# Altium PCB Master-Slave.PcbDoc (part 1 of 2)
Units mil, origin at the board's own origin, x right, y up, seen from the top; angles counter-clockwise.
Board outline 5500 x 5500 mil, 4 copper layers (Top Layer, Ground, Power, Bottom Layer); 228 components, 118 nets, 798 pads, 388 vias.
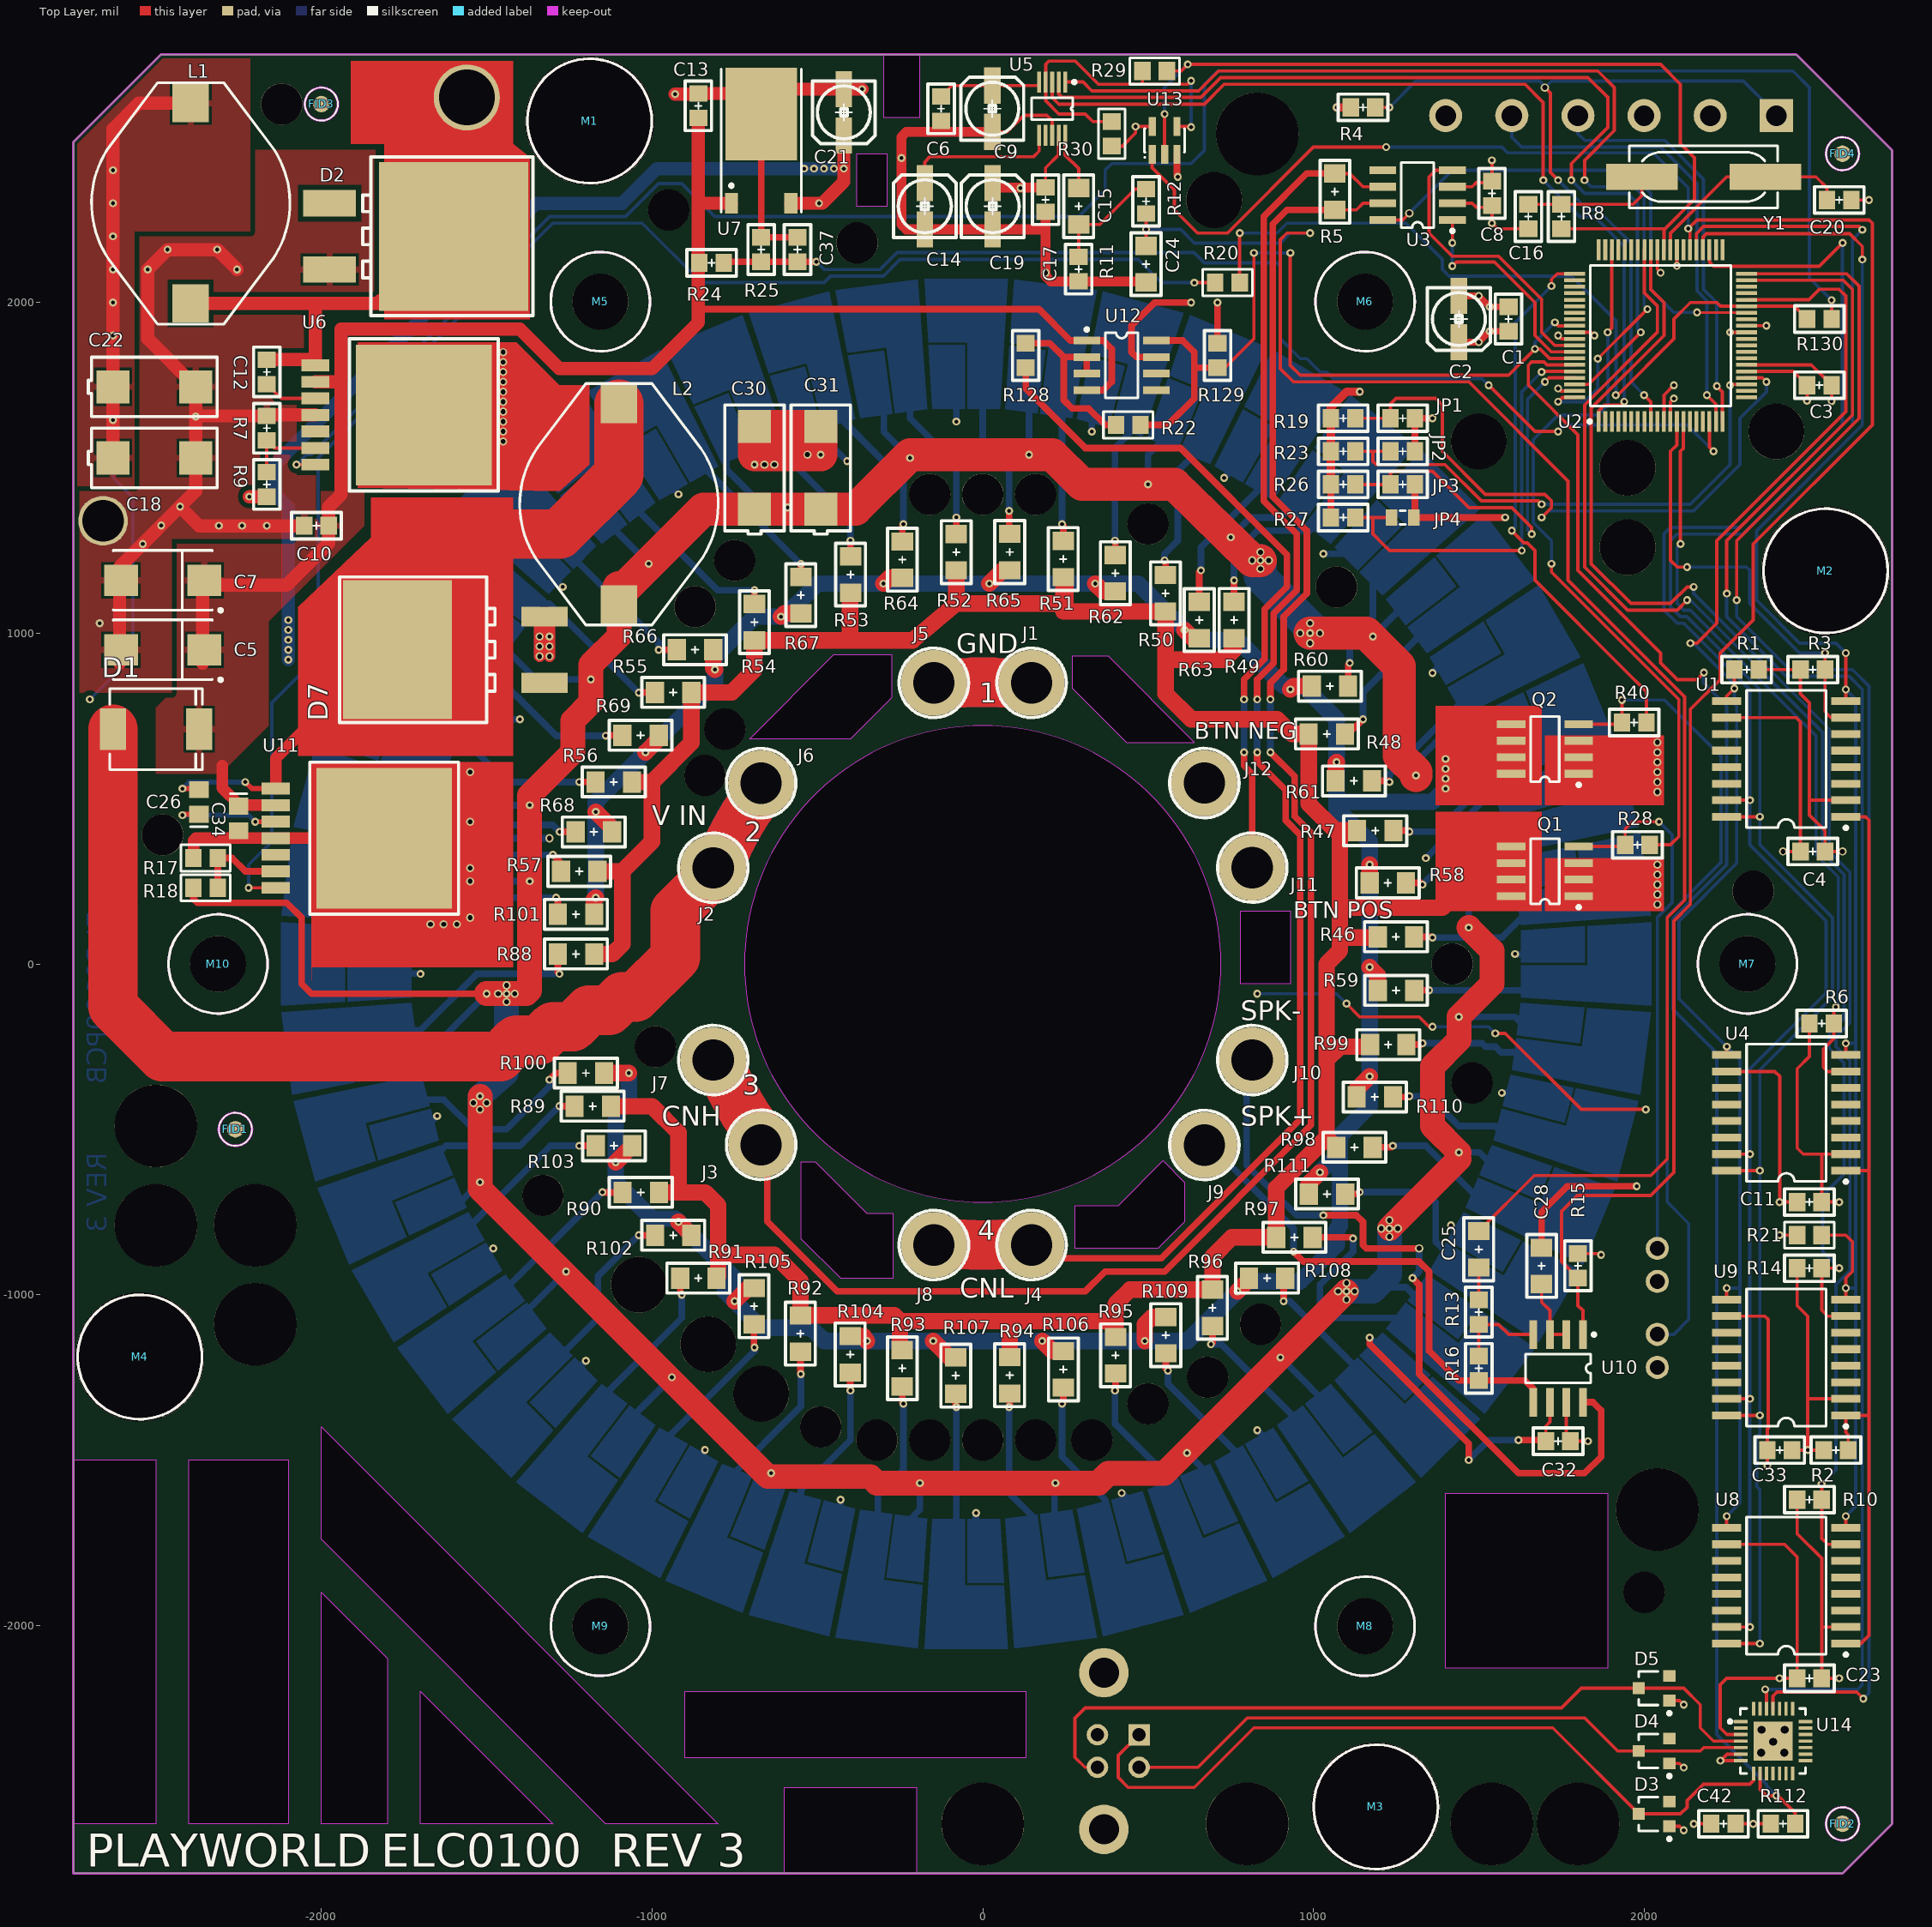
[diagram p0: Top Layer view]
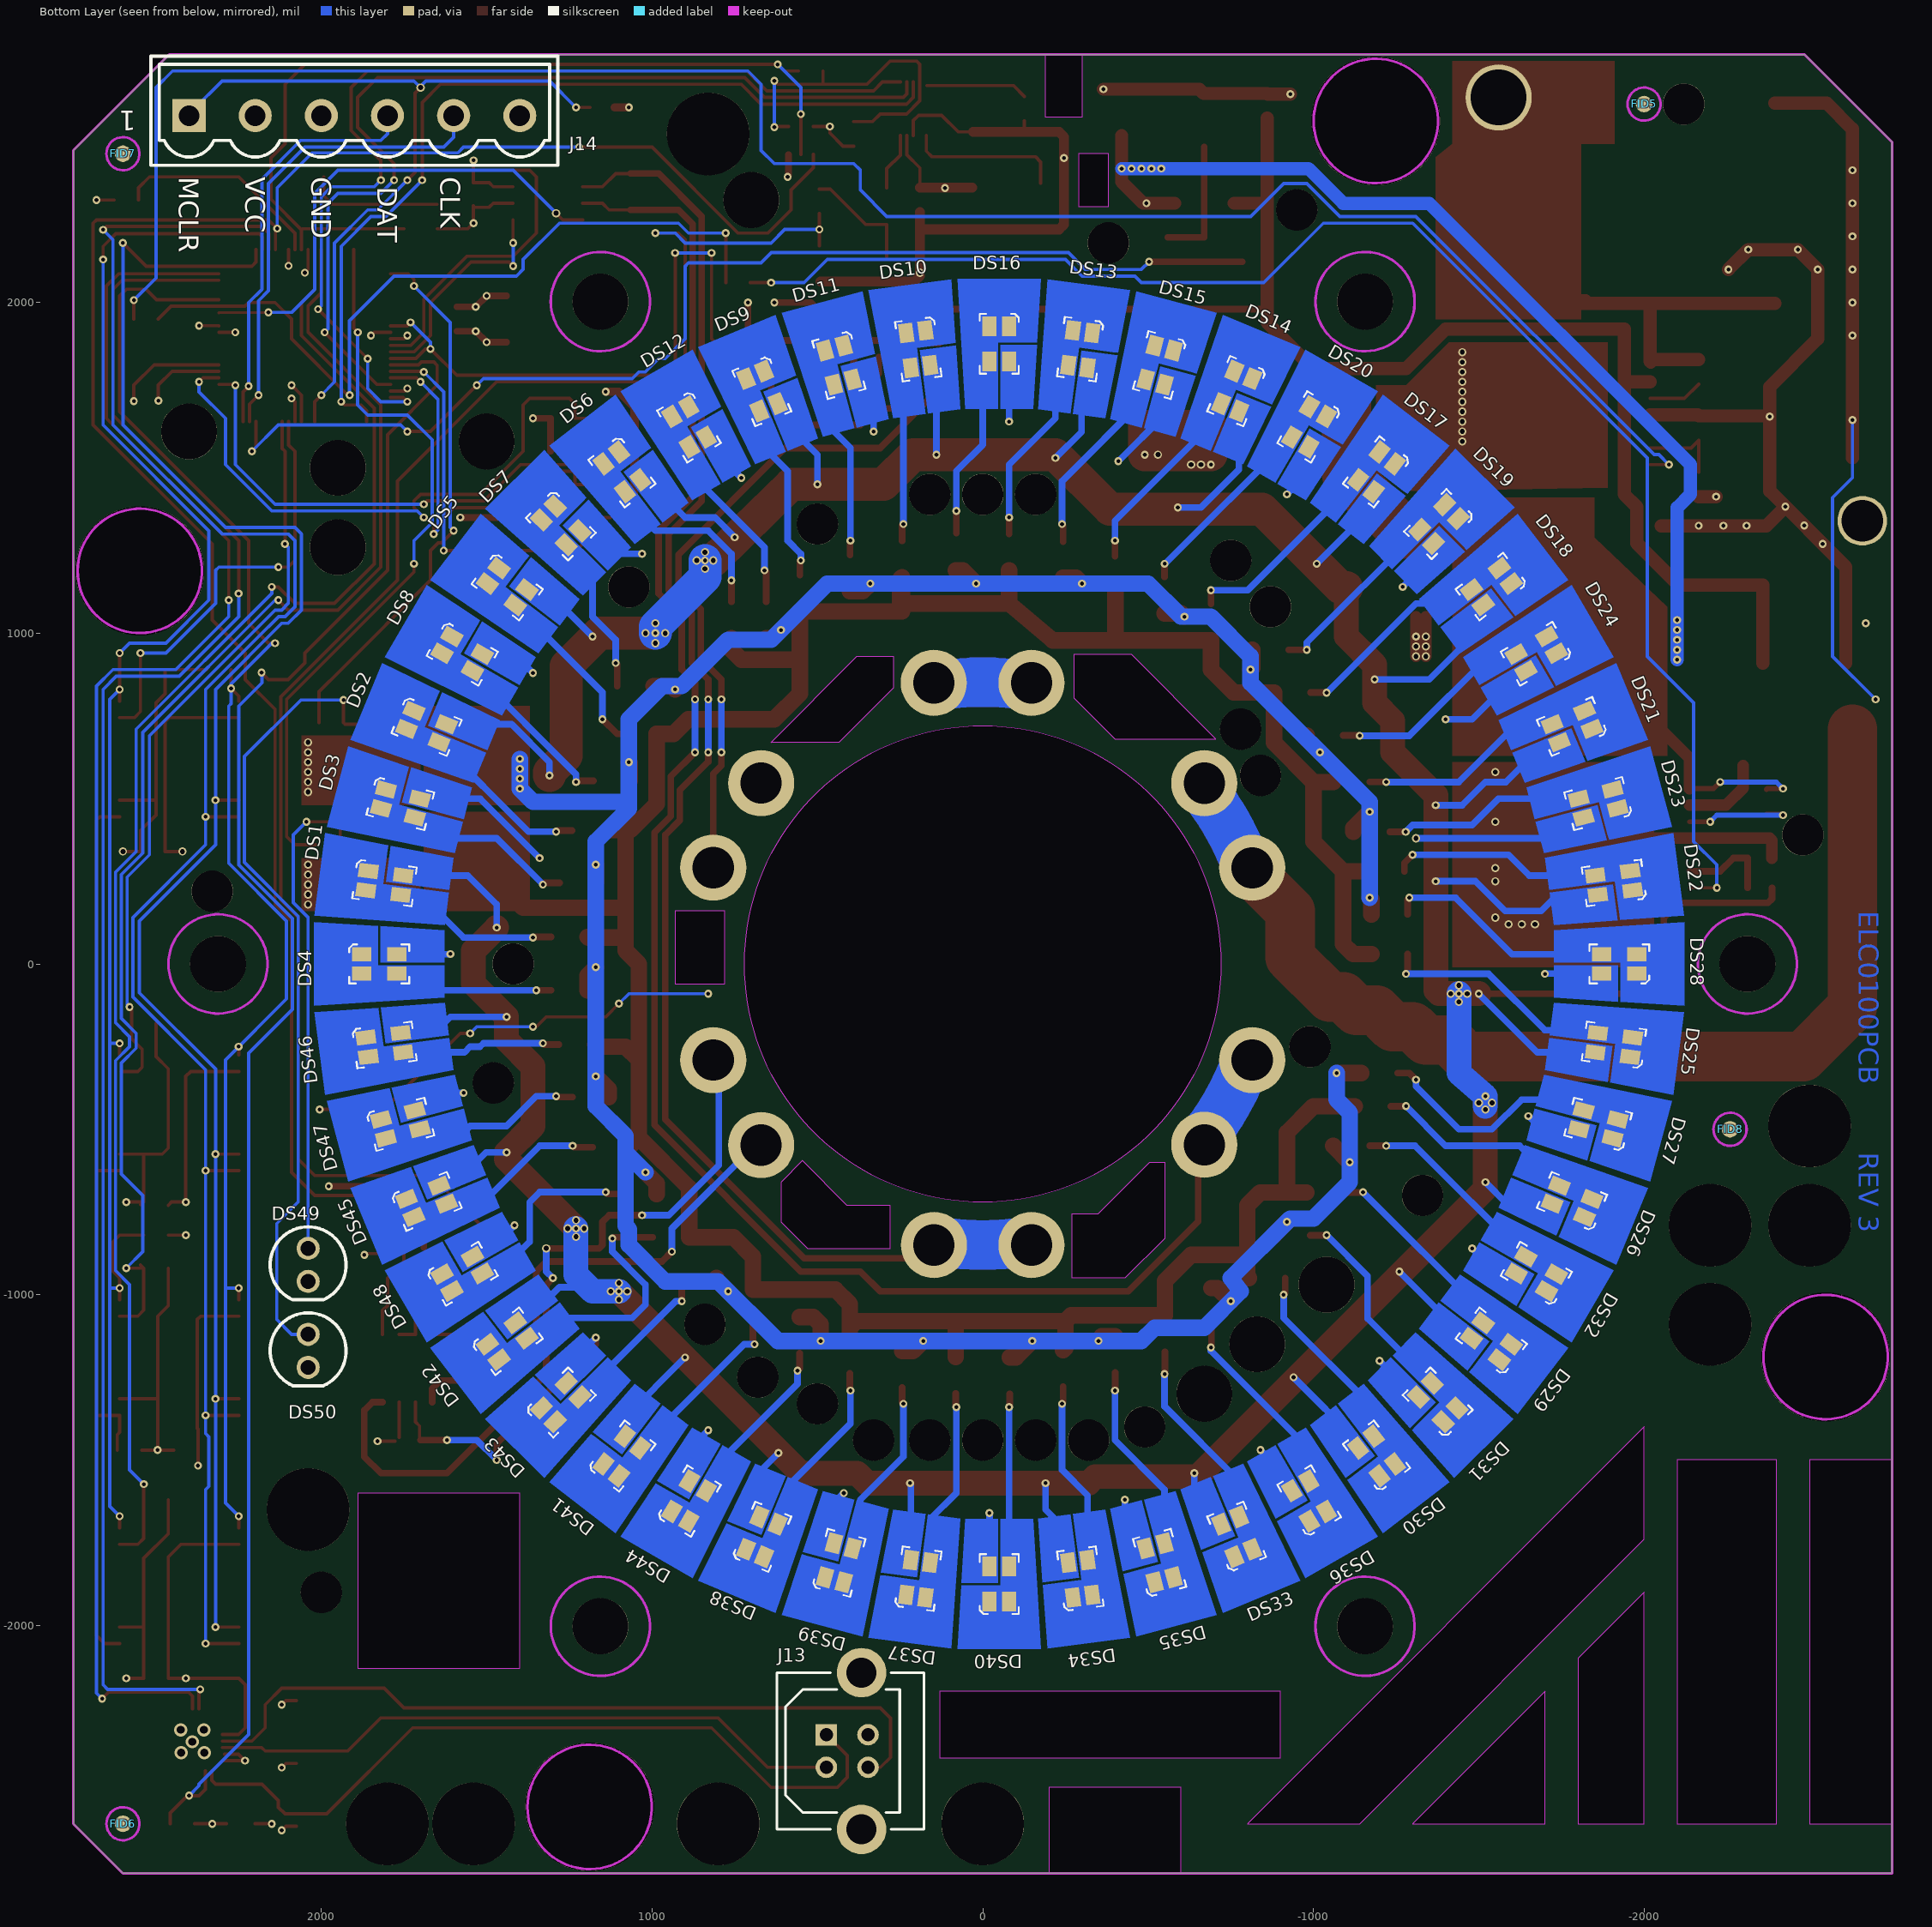
[diagram p1: Bottom Layer view, seen from below]
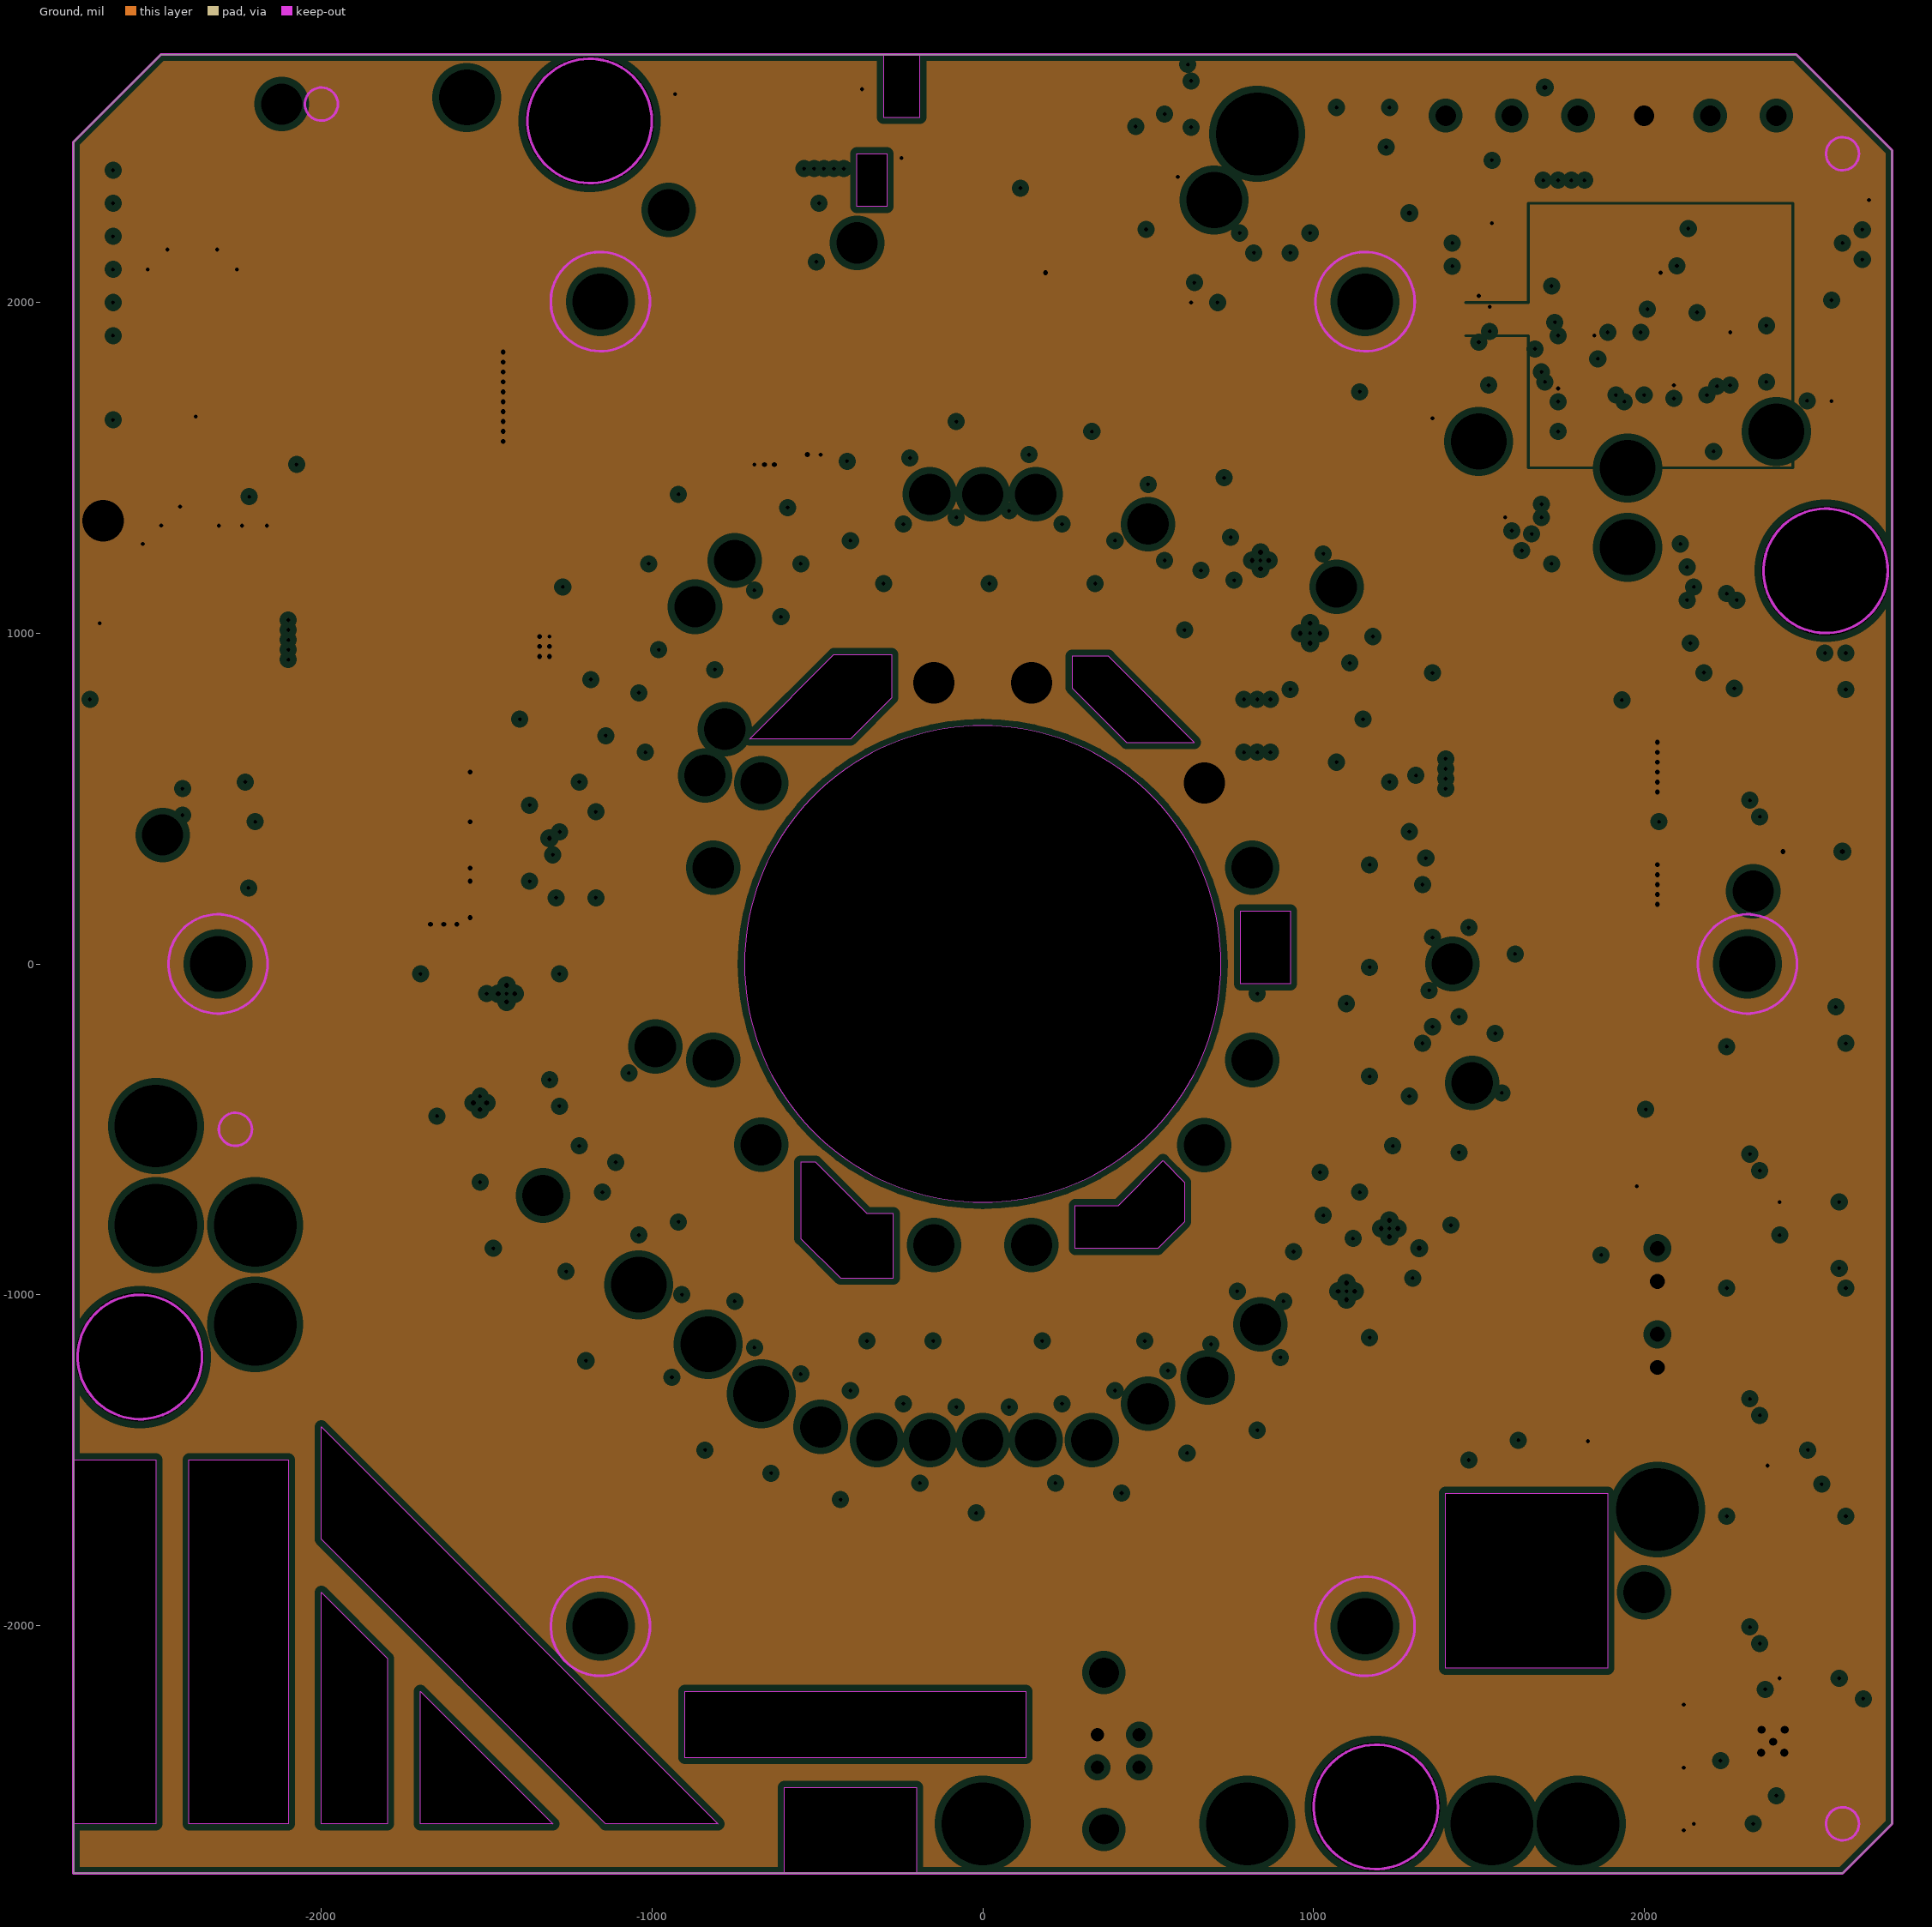
[diagram p2: Ground, clearances drawn from the general rule]
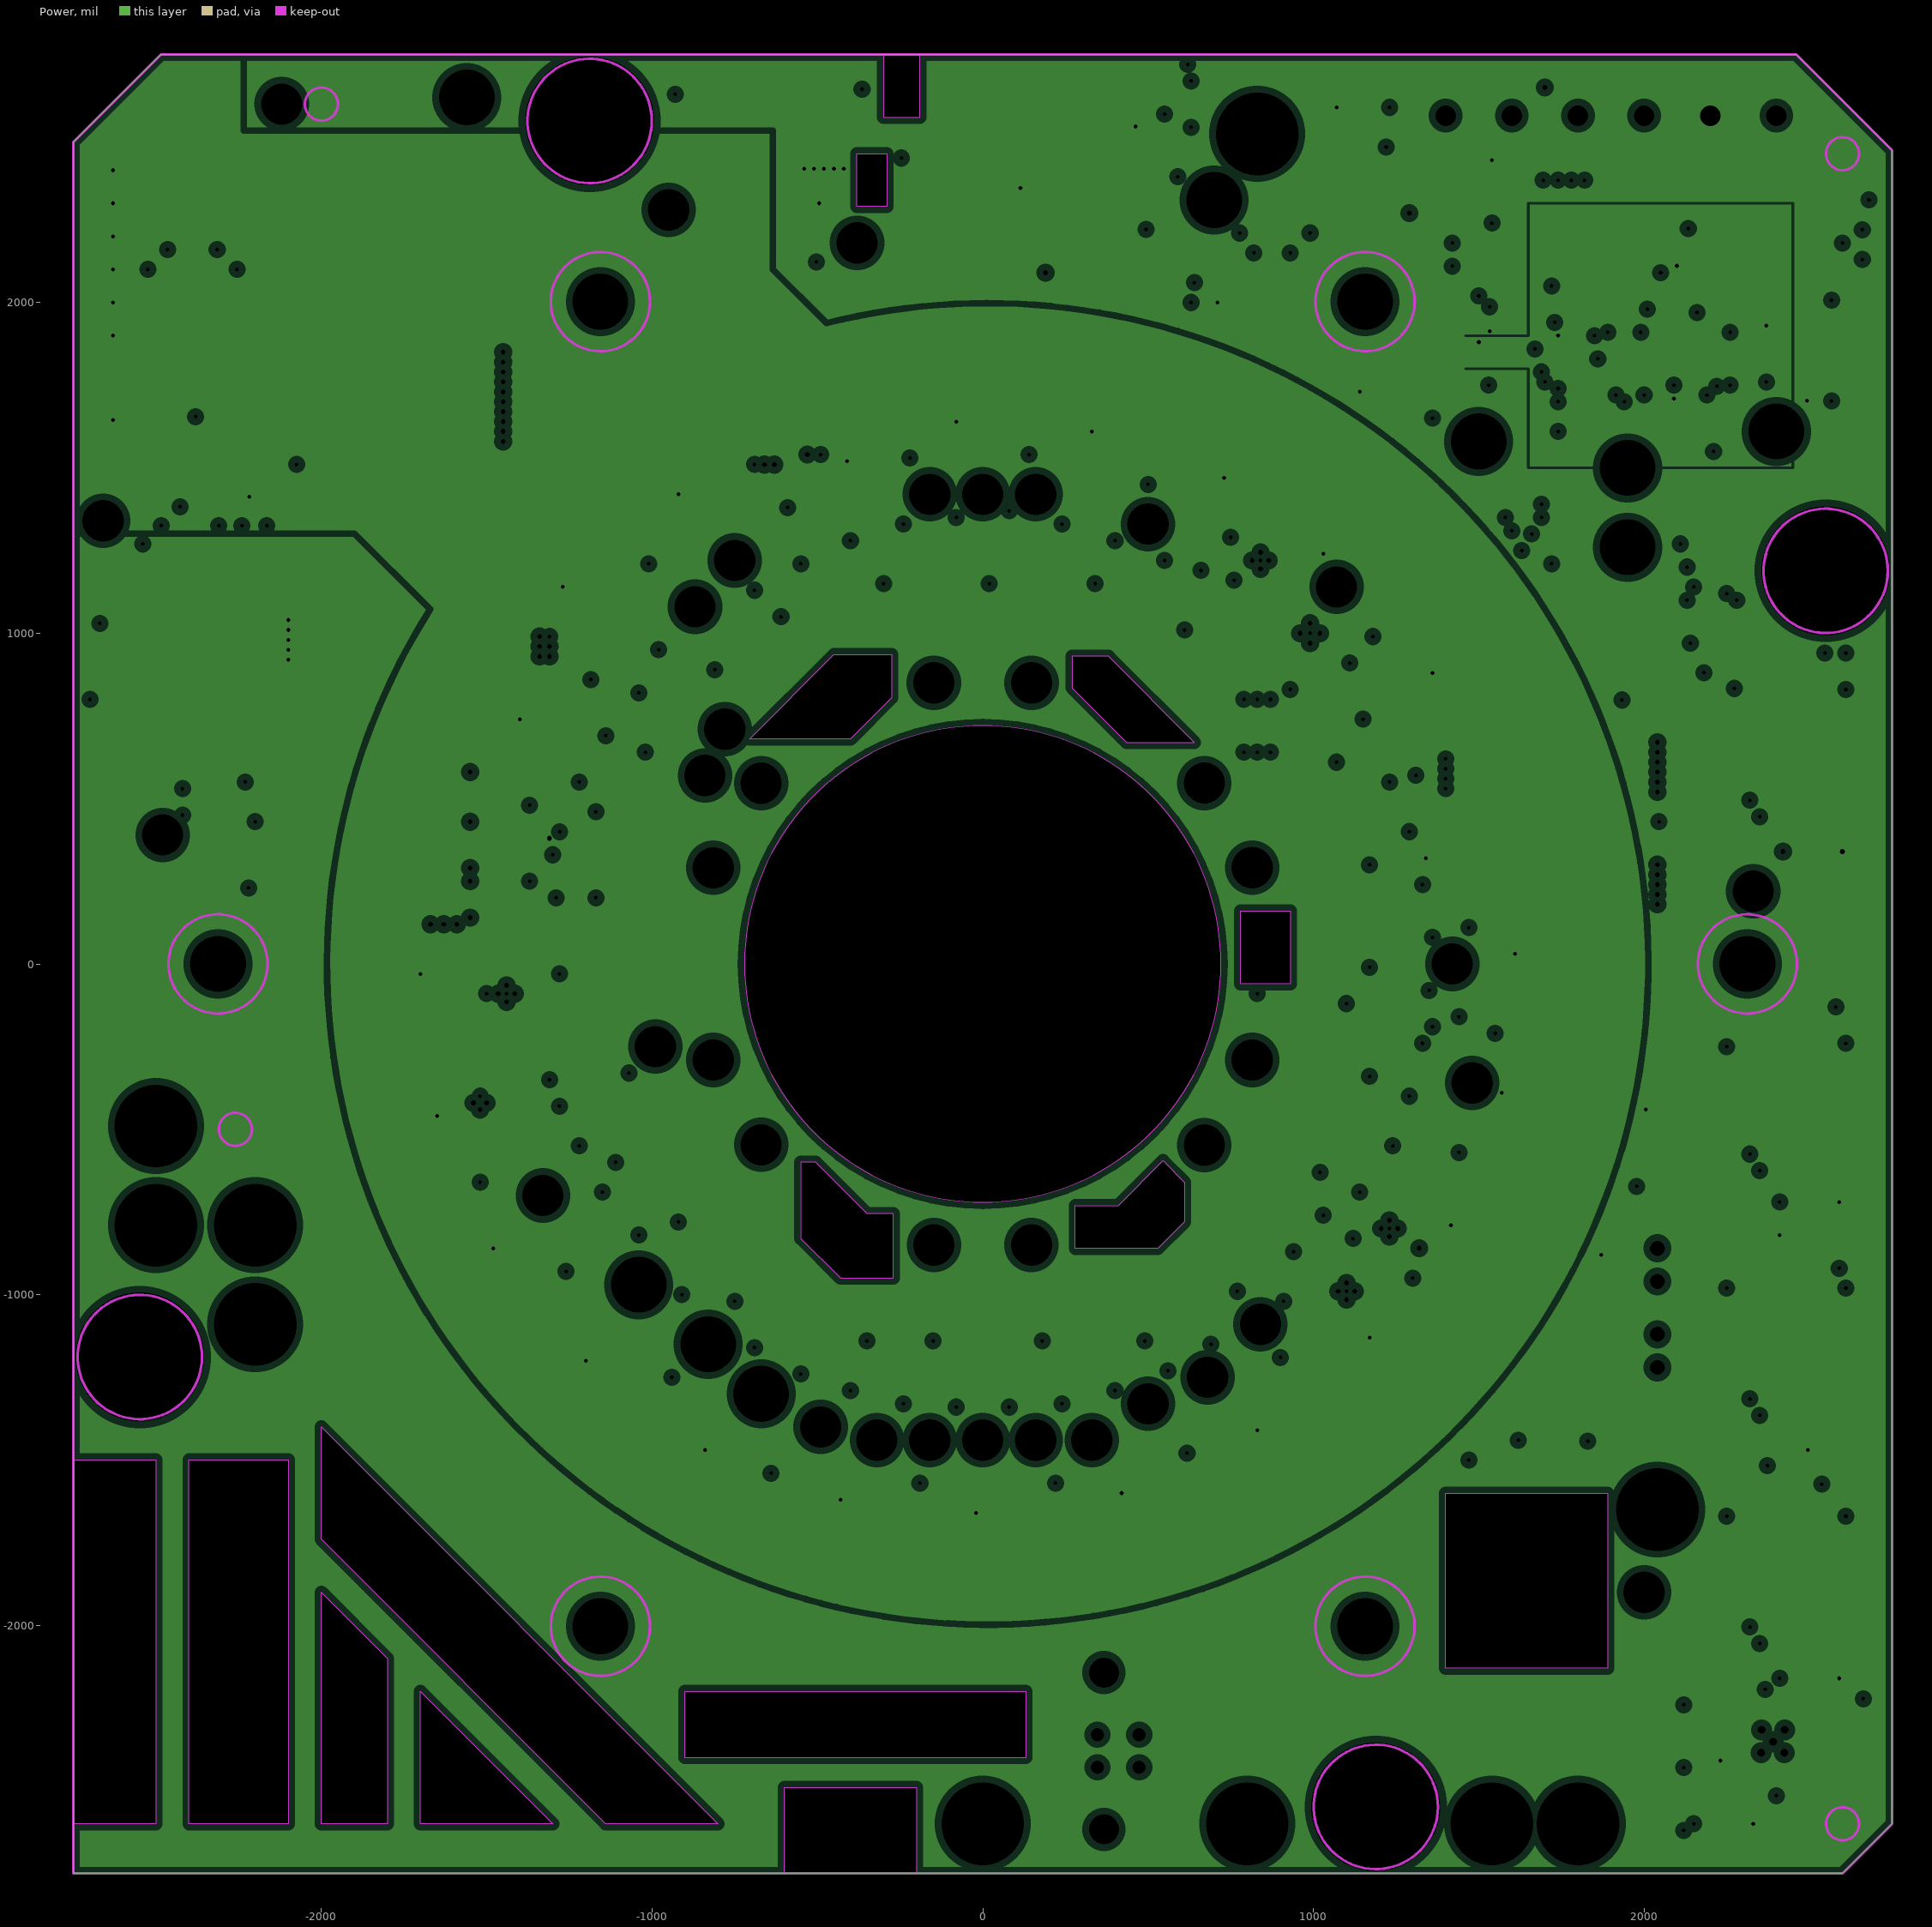
[diagram p3: Power, clearances drawn from the general rule]

## Layer stack, top to bottom
Top Layer: signal copper 1.4
Dielectric: core 12.6, FR-4, Dk 4.8
Ground: plane copper 1.4, net GND
Dielectric: prepreg 12.6, FR-4, Dk 4.8
Power: plane copper 1.4, net (Multiple Nets)
Dielectric: core 12.6, FR-4, Dk 4.8
Bottom Layer: signal copper 1.4

## Board outline
-2750,-2750 2600,-2750 2750,-2600 2750,2460 2460,2750 -2485,2750 -2750,2485
cut-out: -720.62,0 ccw(c0,0) 0,-720.62 ccw(c0,0) 720.62,0 ccw(c0,0) 0,720.62 ccw(c0,0)
cut-out: -2400,-2600 -2400,-1500 -2100,-1500 -2100,-2600
cut-out: -2750,-1500 -2500,-1500 -2500,-2600 -2750,-2600
cut-out: -2000,-1900 -1800,-2100 -1800,-2600 -2000,-2600
cut-out: -1700,-2200 -1300,-2600 -1700,-2600
cut-out: -800,-2600 -1140,-2600 -2000,-1740 -2000,-1400
cut-out: -900,-2400 -900,-2200 130,-2200 130,-2400
cut-out: -600,-2490 -200,-2490 -200,-2750 -600,-2750
cut-out: 1400,-1600 1890,-1600 1890,-2130 1400,-2130
cut-out: -550,-600 -550,-830 -430,-950 -270,-950 -270,-755 -350,-755 -505,-600
cut-out: 280,-860 280,-730 410,-730 545,-595 610,-660 610,-780 530,-860
cut-out: 780,160 930,160 930,-60 780,-60
cut-out: 270,930 270,835 435,670 640,670 380,930
cut-out: -450,935 -275,935 -275,805 -400,680 -705,680
cut-out: -380,2450 -290,2450 -290,2290 -380,2290
cut-out: -300,2750 -300,2560 -190,2560 -190,2750

## Design rules (kind name [scope] priority, off if disabled: settings)
Clearance Clearance_Poly_Gnd [(InPolygon AND InNet('GND')) vs Not InNet('GND')] p1: gap=15
Clearance Clearance_MicroPads [(HasFootprint('TQFP-80')) Or (HasFootprint('TSSOP\10')) Or (HasFootprint('QFN28'))] p2: gap=5
Clearance [All] p3: gap=7.5
ComponentClearance ComponentClearance_LEDs [(HasFootprint('LED T1-3/4 FLUSH')) vs (HasFootprint('LED T1-3/4 FLUSH'))] p1: gap=0 collisioncheckmode=3 verticalgap=0 showdistances=FALSE
ComponentClearance [All] p2: gap=0 collisioncheckmode=3 verticalgap=10 showdistances=FALSE
HoleSize HoleSize_NoNet [HasFootprint('MHole#8') or HasFootprint('MHole250') or (IsPad and InNet('NoNet'))] p1: absolutevalues=TRUE maxlimit=1500 minlimit=1 maxpercent=80.000 minpercent=20.000
HoleSize [All] p2: absolutevalues=TRUE maxlimit=250 minlimit=0 maxpercent=80.000 minpercent=20.000
PlaneClearance [All] p1: clearance=20
PlaneConnect [All] p1: planeconnectstyle=Direct reliefexpansion=20 reliefentries=4 reliefconductorwidth=10 reliefairgap=10
PolygonConnect PolygonConnect_Via [IsVia] p1: connectstyle=Direct reliefconductorwidth=10 reliefentries=4 polygonreliefangle="90 Angle"
PolygonConnect [All] p2: connectstyle=Direct reliefconductorwidth=20 reliefentries=4 polygonreliefangle="90 Angle"
RoutingVias [All] p1: holewidth=12 width=24 viastyle="Through Hole" minholewidth=12 minwidth=24 maxholewidth=28 maxwidth=50
ShortCircuit ShortCircuit_VDD_VCC [(InNet('VCC')) vs InNet('VDD')] p1: allowed=TRUE
ShortCircuit [All] p2: allowed=FALSE
SolderMaskExpansion [All] p1: expansion=4
TestPointUsage [All] p1: valid=0 allowmultiple=FALSE
Testpoint [All] p1: side=15 testpointundercomponent=TRUE minsize=40 maxsize=100 preferedsize=60 minholesize=0 maxholesize=40 preferedholesize=32 testpointgrid=1 style=1023 order=0-112345678
Width Width_Can [(InNet('NetJ3_1') or InNet('NetJ4_1'))] p1: maxlimit=150 minlimit=10 preferedwidth=10
Width Width_Power [InNetClass('Class_Power')] p2: maxlimit=150 minlimit=10 preferedwidth=40
Width [All] p3: maxlimit=200 minlimit=10 preferedwidth=10 minimp=50.000000 maximp=50.000000 favimp=50.000000
14 further rules are at their usual default settings.

## Components (designator, comment, footprint, x,y, rotation, side; value= is the part's Value field where it differs from the comment)
C1 ".1uF 50V" C0805#1 1590,1950 r90 top
C2 "10uF 16V" C4X5.8 1440,1950 r180 top
C3 ".1uF 50V" C0805#1 2530,1750 r0 top
C4 ".1uF 50V" C0805#1 2510,340 r180 top
C5 "47uF 35V" "C EIA7343-43 (X)" -2480,950 r180 top
C6 ".1uF 50V" C0805#1 -126,2586 r270 top
C7 "47uF 35V" "C EIA7343-43 (X)" -2480,1160 r180 top
C8 ".1uF 50V" C0805#1 1540,2330 r270 top
C9 "10uF 16V" C4X5.8 29,2586 r0 top
C10 ".1uF 50V" C0805#1 -2015,1325 r180 top
C11 ".1uF 50V" C0805#1 2500,-720 r180 top
C12 ".01uF 50V" C0805#1 -2165,1790 r90 top
C13 ".1uF 50V" C0805#1 -860,2595 r90 top
C14 "10uF 16V" C4X5.8 -175,2291 r0 top
C15 "1uF 25V" R1206 290,2291 r270 top
C16 "18pF" C0805#1 1650,2260 r270 top
C17 ".1uF 50V" C0805#1 190,2311 r270 top
C18 "68uF 16V" C7343 -2505,1530 r0 top
C19 "10uF 16V" C4X5.8 30,2291 r0 top
C20 "18pF" C0805#1 2590,2310 r0 top
C21 "10uF 16V" C4X5.8 -420,2575 r180 top
C22 "68uF 16V" C7343 -2505,1745 r0 top
C23 ".1uF 50V" C0805#1 2500,-2160 r180 top locked
C24 "1uF 25V" R1206 494,2116 r270 top
C25 ".33uF 25V" R1206 1500,-863 r270 top
C26 ".01uF 50V" C0805#2 -2370,490 r90 top
C28 "1uF 25V" R1206 1690,-913 r90 top
C30 "68uF 16V" C7343 -690,1500 r90 top
C31 "68uF 16V" C7343 -490,1500 r90 top
C32 ".1uF 50V" C0805#1 1740,-1443 r0 top
C33 ".1uF 50V" C0805#1 2410,-1470 r180 top locked
C34 ".1uF 50V" C0805#2 -2250,440 r270 top
C37 ".1uF 50V" C0805#1 -560,2160 r90 top
C42 ".1uF 50V" C0805#1 2240,-2600 r180 top locked
D1 "DIODE ULTRA FAST 3A 600V SMC" DIODE_SMC -2500,710 r0 top
D2 "8A 80V" D2PAK#1 -1600,2200 r270 top
D3 "BAS16" SOT23 2030,-2570 r90 top
D4 "BAS16" SOT23 2030,-2380 r90 top
D5 "BAS16" SOT23 2030,-2190 r90 top
D7 "8A 80V" D2PAK#2 -1770,950 r90 top
DS1 "TLMK3210" L#S/TLMK3210Z 1809,245 r277.5 bottom locked
DS2 "TLMK3210" L#S/TLMK3210Z 1682,718 r292.5 bottom locked
DS3 "LM1-PPG1-01-N1" L#S/TLMK3210Z 1761,485 r285 bottom
DS4 "LM1-PPG1-01-N1" L#S/TLMK3210Z 1825,0 r270 bottom
DS5 "TLMK3210" L#S/TLMK3210Z 1438,1141 r307.5 bottom locked
DS6 "TLMK3210" L#S/TLMK3210Z 1091,1488 r322.5 bottom locked
DS7 "LM1-PPG1-01-N1" L#S/TLMK3210Z 1276,1326 r315 bottom
DS8 "LM1-PPG1-01-N1" L#S/TLMK3210Z 1574,938 r300 bottom
DS9 "TLMK3210" L#S/TLMK3210Z 668,1732 r337.5 bottom locked
DS10 "TLMK3210" L#S/TLMK3210Z 195,1859 r352.5 bottom locked
DS11 "LM1-PPG1-01-N1" L#S/TLMK3210Z 435,1811 r345 bottom
DS12 "LM1-PPG1-01-N1" L#S/TLMK3210Z 888,1624 r330 bottom
DS13 "TLMK3210" L#S/TLMK3210Z -295,1859 r7.5 bottom locked
DS14 "TLMK3210" L#S/TLMK3210Z -768,1732 r22.5 bottom locked
DS15 "LM1-PPG1-01-N1" L#S/TLMK3210Z -535,1811 r15 bottom
DS16 "LM1-PPG1-01-N1" L#S/TLMK3210Z -50,1875 r0 bottom
DS17 "TLMK3210" L#S/TLMK3210Z -1191,1488 r37.5 bottom locked
DS18 "TLMK3210" L#S/TLMK3210Z -1538,1141 r52.5 bottom locked
DS19 "LM1-PPG1-01-N1" L#S/TLMK3210Z -1380,1330 r45 bottom
DS20 "LM1-PPG1-01-N1" L#S/TLMK3210Z -987,1624 r30 bottom
DS21 "TLMK3210" L#S/TLMK3210Z -1782,718 r67.5 bottom
DS22 "TLMK3210" L#S/TLMK3210Z -1909,245 r82.5 bottom locked
DS23 "LM1-PPG1-01-N1" L#S/TLMK3210Z -1861,485 r75 bottom
DS24 "LM1-PPG1-01-N1" L#S/TLMK3210Z -1674,938 r60 bottom
DS25 "TLMK3210" L#S/TLMK3210Z -1909,-245 r97.5 bottom locked
DS26 "TLMK3210" L#S/TLMK3210Z -1782,-718 r112.5 bottom locked
DS27 "LM1-PPG1-01-N1" L#S/TLMK3210Z -1861,-485 r105 bottom
DS28 "LM1-PPG1-01-N1" L#S/TLMK3210Z -1925,0 r90 bottom
DS29 "TLMK3210" L#S/TLMK3210Z -1538,-1141 r127.5 bottom locked
DS30 "TLMK3210" L#S/TLMK3210Z -1191,-1488 r142.5 bottom locked
DS31 "LM1-PPG1-01-N1" L#S/TLMK3210Z -1376,-1326 r135 bottom
DS32 "LM1-PPG1-01-N1" L#S/TLMK3210Z -1674,-937 r120 bottom
DS33 "TLMK3210" L#S/TLMK3210Z -768,-1732 r157.5 bottom locked
DS34 "TLMK3210" L#S/TLMK3210Z -295,-1859 r172.5 bottom locked
DS35 "LM1-PPG1-01-N1" L#S/TLMK3210Z -535,-1811 r165 bottom
DS36 "LM1-PPG1-01-N1" L#S/TLMK3210Z -987,-1624 r150 bottom
DS37 "TLMK3210" L#S/TLMK3210Z 195,-1859 r187.5 bottom locked
DS38 "TLMK3210" L#S/TLMK3210Z 668,-1732 r202.5 bottom locked
DS39 "LM1-PPG1-01-N1" L#S/TLMK3210Z 435,-1811 r195 bottom
DS40 "LM1-PPG1-01-N1" L#S/TLMK3210Z -50,-1875 r180 bottom
DS41 "TLMK3210" L#S/TLMK3210Z 1091,-1488 r217.5 bottom locked
DS42 "TLMK3210" L#S/TLMK3210Z 1438,-1141 r232.5 bottom
DS43 "LM1-PPG1-01-N1" L#S/TLMK3210Z 1276,-1326 r225 bottom
DS44 "LM1-PPG1-01-N1" L#S/TLMK3210Z 888,-1624 r210 bottom
DS45 "TLMK3210" L#S/TLMK3210Z 1682,-718 r247.5 bottom locked
DS46 "TLMK3210" L#S/TLMK3210Z 1809,-245 r262.5 bottom locked
DS47 "LM1-PPG1-01-N1" L#S/TLMK3210Z 1761,-485 r255 bottom
DS48 "LM1-PPG1-01-N1" L#S/TLMK3210Z 1574,-937 r240 bottom
DS49 "RED LED T1-3/4" "LED T1-3/4 Flush" 2040,-860 r270 bottom
DS50 "GREEN T1-3/4" "LED T1-3/4 Flush" 2040,-1120 r270 bottom
FID1 "Fiducial" Fiducial#1 -2260,-500 r90 top
FID2 "Fiducial" Fiducial#1 2600,-2600 r90 top locked
FID3 "Fiducial" Fiducial#1 -2000,2600 r90 top locked
FID4 "Fiducial" Fiducial#1 2600,2450 r90 top
FID5 "Fiducial" Fiducial#2 -2000,2600 r90 top
FID6 "Fiducial" Fiducial#2 2600,-2600 r90 top
FID7 "Fiducial" Fiducial#2 2600,2450 r90 top
FID8 "Fiducial" Fiducial#2 -2260,-500 r90 top
J1 "*" WIRE_125 147.97,850 r0 top
J2 "*" WIRE_125 -815,290.64 r0 top
J3 "*" WIRE_125 -670,-546.94 r0 top
J4 "*" WIRE_125 147.64,-850 r0 top
J5 "*" WIRE_125 -147.77,850 r0 top
J6 "*" WIRE_125 -670,546.64 r0 top
J7 "*" WIRE_125 -815,-290.58 r0 top
J8 "*" WIRE_125 -147.59,-850 r0 top
J9 "*" WIRE_125 670,-547.63 r180 top
J10 "*" WIRE_125 815,-290.58 r0 top
J11 "*" WIRE_125 815,291.32 r0 top
J12 "*" WIRE_125 670,546.86 r270 top
J13 "KUSBVX-BS1N-B" KUSBVX-BS1N 400,-2380 r90 bottom locked
J14 "Phoenix Contact 1755778" JCPM5086VE0Z 2400,2565 r180 bottom locked
JP1 "0 Ohm Config" R0805 1270,1650 r0 top
JP2 "0 Ohm Config" R0805 1270,1550 r0 top
JP3 "0 Ohm Config" R0805 1270,1450 r0 top
JP4 "0 Ohm Config" 0805 1270,1350 r0 top
L1 "33uH 3A" IND/DO5022 -2395,2300 r90 top
L2 "33uH 3A" IND/DO5022 -1100,1390 r270 top
M1 "Mounting Hole 1/4\" Screw" MHole250 -1188.61,2548.99 r0 top locked
M2 "Mounting Hole 1/4\" Screw" MHole250 2548.99,1188.61 r0 top locked
M3 "Mounting Hole 1/4\" Screw" MHole250 1188.61,-2548.99 r0 top locked
M4 "Mounting Hole 1/4\" Screw" MHole250 -2548.99,-1188.61 r0 top locked
M5 "Mounting Hole #8 Screw" MHole#8 -1156.3,2002.7 r0 top
M6 "Mounting Hole #8 Screw" MHole#8 1156.3,2002.7 r0 top
M7 "Mounting Hole #8 Screw" MHole#8 2312.5,0 r0 top
M8 "Mounting Hole #8 Screw" MHole#8 1156.2,-2002.7 r0 top
M9 "Mounting Hole #8 Screw" MHole#8 -1156.2,-2002.7 r0 top
M10 "Mounting Hole #8 Screw" MHole#8 -2312.5,0 r0 top
Q1 "FDS8884" SO8 1700,280 r90 top
Q2 "FDS8884" SO8 1700,650 r90 top
R1 "100K 1%" R0805 2310,890 r180 top
R2 "100K 1%" R0805 2580,-1470 r0 top locked
R3 "100K 1%" R0805 2510,890 r180 top
R4 "10.0k 1%" R0805 1150,2590 r180 top
R5 "121 1%" R1206 1065,2335 r270 top
R6 "100K 1%" R0805 2537,-180 r180 top
R7 "1.0k 1%" R0805 -2165,1620 r270 top
R8 "0" R0805 1750,2260 r90 top
R9 "3.16K 1%" R0805 -2165,1450 r270 top
R10 "100K 1%" R0805 2500,-1620 r180 top locked
R11 "10.0k 1%" R0805 290,2101 r90 top
R12 "499 1%" R0805 494,2306 r270 top
R13 "3.32k 1%" R0805 1500,-1053 r270 top
R14 "100K 1%" R0805 2500,-920 r180 top locked
R15 "47.5k 1%" R0805 1800,-913 r90 top
R16 "20.0k 1%" R0805 1500,-1223 r270 top
R17 "1.0k 1%" R0805 -2350,320 r0 top
R18 "1.65K 1%" R0805 -2350,230 r180 top
R19 "100K 1%" R0805 1090,1650 r180 top
R20 "10.0k 1%" R0805 740,2060 r180 top
R21 "100K 1%" R0805 2500,-820 r180 top
R22 "0" R0805 440,1630 r0 top
R23 "100K 1%" R0805 1090,1550 r180 top
R24 "7.50k 1%" R0805 -820,2120 r180 top
R25 "2.49k 1%" R0805 -670,2160 r270 top
R26 "100K 1%" R0805 1090,1450 r180 top
R27 "100K 1%" R0805 1090,1350 r180 top
R28 "10.0k 1%" R0805 1980,360 r180 top
R29 "0" R0805 520,2700 r180 top
R30 "100K 1%" R0805 390,2510 r270 top
R40 "10.0k 1%" R0805 1970,730 r180 top
R46 "15.0 OHM 1%" R1206 1249.68,81.91 r0 top
R47 "15.0 OHM 1%" R1206 1187.13,402.98 r0 top
R48 "15.0 OHM 1%" R1206 1040.71,695.38 r0 top
R49 "15.0 OHM 1%" R1206 760,1040 r90 top
R50 "15.0 OHM 1%" R1206 552.66,1120.69 r90 top
R51 "15.0 OHM 1%" R1206 243.53,1224.3 r90 top
R52 "15.0 OHM 1%" R1206 -80,1245 r90 top
R53 "15.0 OHM 1%" R1206 -399.65,1177.34 r90 top
R54 "15.0 OHM 1%" R1206 -690.49,1033.38 r90 top
R55 "15.0 OHM 1%" R1206 -936.19,821.02 r180 top
R56 "15.0 OHM 1%" R1206 -1115.83,550.27 r180 top
R57 "15.0 OHM 1%" R1206 -1220,280 r180 top
R58 "32.4 OHM 1%" R1206 1225,245 r0 top
R59 "32.4 OHM 1%" R1206 1250,-80 r0 top
R60 "32.4 OHM 1%" R1206 1050,840 r0 top
R61 "32.4 OHM 1%" R1206 1122.42,553.52 r0 top
R62 "32.4 OHM 1%" R1206 401.06,1181.48 r90 top
R63 "32.4 OHM 1%" R1206 654.82,1039.87 r90 top
R64 "32.4 OHM 1%" R1206 -243.14,1222.36 r90 top
R65 "32.4 OHM 1%" R1206 81.63,1245.45 r90 top
R66 "32.4 OHM 1%" R1206 -870,950 r180 top
R67 "32.4 OHM 1%" R1206 -549.94,1115.17 r90 top
R68 "32.4 OHM 1%" R1206 -1176.14,399.24 r180 top
R69 "32.4 OHM 1%" R1206 -1034.61,691.3 r180 top
R88 "15.0 OHM 1%" R1206 -1230,30 r180 top
R89 "15.0 OHM 1%" R1206 -1179.45,-430.37 r180 top
R90 "15.0 OHM 1%" R1206 -1033.98,-690.88 r180 top
R91 "15.0 OHM 1%" R1206 -860,-950 r180 top
R92 "15.0 OHM 1%" R1206 -551.29,-1117.9 r270 top
R93 "15.0 OHM 1%" R1206 -243.22,-1222.75 r270 top
R94 "15.0 OHM 1%" R1206 81.53,-1243.9 r270 top
R95 "15.0 OHM 1%" R1206 401.68,-1183.3 r270 top
R96 "15.0 OHM 1%" R1206 694.76,-1039.78 r270 top
R97 "15.0 OHM 1%" R1206 942.65,-826.68 r0 top
R98 "15.0 OHM 1%" R1206 1124.23,-554.41 r0 top
R99 "15.0 OHM 1%" R1206 1226.39,-243.94 r0 top
R100 "32.4 OHM 1%" R1206 -1200,-330 r180 top
R101 "32.4 OHM 1%" R1206 -1230,150 r180 top
R102 "32.4 OHM 1%" R1206 -935.78,-820.66 r180 top
R103 "32.4 OHM 1%" R1206 -1115.01,-549.86 r180 top
R104 "32.4 OHM 1%" R1206 -400.81,-1180.74 r270 top
R105 "32.4 OHM 1%" R1206 -691.55,-1034.98 r270 top
R106 "32.4 OHM 1%" R1206 243.89,-1226.1 r270 top
R107 "32.4 OHM 1%" R1206 -81.59,-1244.84 r270 top
R108 "32.4 OHM 1%" R1206 860,-950 r0 top
R109 "32.4 OHM 1%" R1206 553.58,-1122.54 r270 top
R110 "32.4 OHM 1%" R1206 1185.61,-402.46 r0 top
R111 "32.4 OHM 1%" R1206 1041.27,-695.75 r0 top
R112 "10.0k 1%" R0805 2420,-2600 r180 top locked
R128 "3.16K 1%" R0805 130,1840 r90 top
R129 "20.0k 1%" R0805 710,1840 r90 top
R130 "10.0k 1%" R0805 2530,1950 r0 top
U1 "M25P64-VMF6G" so16w 2430,620 r90 top locked
U2 "dsPIC30F5013-20I/PT" TQFP-80 2050,1900 r90 top locked
U3 "SN65HVD230DR" "SOIC 8" 1315,2325 r90 top
U4 "M25P64-VMF6G" so16w 2430,-450 r90 top locked
U5 "CS4344-CZZ" TSSOP\10 210,2586 r180 top
U6 "LM2676S-ADJ/NOPB" TO263\7 -1690,1660 r270 top
U7 "LP2950CDT-3.3" "D-PAK / TO-252AA" -670,2435 r0 top
U8 "M25P64-VMF6G" so16w 2430,-1880 r90 top locked
U9 "M25P64-VMF6G" so16w 2430,-1190 r90 top locked
U10 "LM4861M" M08A 1740,-1223 r180 top
U11 "LM2676S-ADJ/NOPB" TO263\7 -1810,380 r270 top
U12 "MOCD207M" "SOIC 8" 420,1810 r270 top
U13 "SN74AHC1G125DBVR" SOT23-5 550,2490 r0 top
U14 "IC USB-TO-UART BRIDGE 28MLP" QFN-28 2390,-2350 r0 top
Y1 "8.192MHz" XTSL\CSM-7 2180,2380 r180 top

## Footprints (in the part's own frame and the unit in brackets; to place one, negate y for a bottom-side part, rotate by r counter-clockwise, add the part's x,y. Pads: shape width x height; smd on the part's side, far side on the other; paste and mask are expansions set on the pad)
0805 [mm] "0805 Generic"
  rect 0.9x1.25 smd: 1(-0.85,0) 2(0.85,0)
  silkscreen extent -0.2,-0.53 0.2,0.53, body extent -1.02,-0.64 1,0.64, height 0.61
C4X5.8 [mil]
  rect 50x110 smd: 1(0,70) 2(0,-70)
  silkscreen extent -95,-95 95,95
C0805#1 [mil]
  rect 50x55 smd: 1(-37,0) 2(37,0)
  silkscreen extent -75,-40 75,40
C0805#2 [mil] "Chip Capacitor; Body 2.0 x 1.2 mm (LxW typ)"
  rect 51.18x59.06 smd: 1(-37.4,0) 2(37.4,0)
  silkscreen extent -75,-26 -75,26
C7343 [mil]
  rect 100x100 smd: 1(-125,0) 2(125,0)
  silkscreen extent -200,-90 190,90
"C EIA7343-43 (X)" [mm] "Capacitor, SM Tantalum; Body 7.3 x 4.3 mm (LxW typ)"
  rect 2.6x2.4 smd: 1(-3.2,0) 2(3.2,0)
  silkscreen extent -4.58,-2.3 3.8,2.42
D2PAK#1 [mil]
  rect 80x160 smd: 1(-100,-375) 3(100,-375)
  rect 450x450 smd: 2(0,0)
  silkscreen extent -240,-275 240,240
D2PAK#2 [mil]
  rect 60x140 smd: 1(-100,-445) 3(100,-445)
  rect 420x330 smd: 2(0,0)
  silkscreen extent -220,-295 220,175
"D-PAK / TO-252AA" [mm] "D-PAK/TO-252-AA; 3 Leads (1 Cropped); Body 10.4 (inc. leads) x 6.7 mm (LxW max)"
  rect 1x1.6 smd: 1(-2.285,-3.425) 3(2.285,-3.425)
  rect 5.5x7.1 smd: 2(0,3.425)
  silkscreen extent -3.08,-4.13 3.08,6.88
DIODE_SMC [mm] "Diode"
  rect 2x3.2 smd: A(-3.305,0) K(3.305,0)
  silkscreen extent -3.55,-3.11 3.55,3.11
Fiducial#1 [mil]
  round 50 smd mask+20: 1(0,0)
  Keep-Out Layer circle w7.87: c0,0 r50
  silkscreen extent -50,-50 50,50
Fiducial#2 [mil]
  round 50 smd far side mask+20: 1(0,0)
  Keep-Out Layer circle w7.87: c0,0 r50
  silkscreen extent -50,-50 50,50
IND/DO5022 [mil]
  rect 115x110 smd: 1(-302.5,0) 2(302.5,0)
  silkscreen extent -365,-300 365,300
JCPM5086VE0Z [mil] "ASI term strip header 6P 5.08mm Vert"
  rect 100x100 / inner round 100 / far side rect 100x100 hole 62: 1(0,0)
  round 100 hole 62: 2(200,0) 3(400,0) 4(600,0) 5(800,0) 6(1000,0)
  silkscreen extent -115,-150 1115,180
KUSBVX-BS1N [mm] "USB Type B PCB"
  rect 1.651x1.651 hole 1.016: 1(1.25,1.85)
  round 1.651 hole 1.016: 2(-1.25,1.85) 3(-1.25,-1.35) 4(1.25,-1.35)
  round 3.8 hole 2.3: 5(6.02,-0.85) 6(-6.02,-0.85)
  silkscreen extent -6.02,-5.65 6.02,5.65
L#S/TLMK3210Z [mm]
  rect 1.1x1.5 smd mask+0: 1(-0.75,-1.35) 2(-0.75,1.35) 3(0.75,1.35) 4(0.75,-1.35)
  Top Layer region: -2.9,-0.1 -3.2,-5 3.2,-5 2.6,5 0.1,5 0.1,-0.1 -2.5,-0.1
  Top Layer region: -2.6,5 -0.1,5 -0.1,0.1 -2.9,0.1 -2.6,5
  silkscreen extent -1.5,-2.3 1.5,2.3
"LED T1-3/4 Flush" [mil]
  round 70 hole 45: 1(0,0) 2(100,0)
  silkscreen extent -65,-115 155,115
M08A [mm] "Small Outline; 8 Leads; Body Width 3.9 mm; Pitch 1.27 mm"
  rect 0.6x2.2 smd: 1(-1.905,-2.6) 2(-0.635,-2.6) 3(0.635,-2.6) 4(1.905,-2.6) 5(1.905,2.6) 6(0.635,2.6) 7(-0.635,2.6) 8(-1.905,2.6)
  silkscreen extent -2.88,-2.72 2.5,1.1
MHole250 [mil] "Mounting hole for .25\" screw"
  round 390 hole 390 unplated: 0(0,0)
  Keep-Out Layer circle w8: c0,0 r188
  silkscreen extent -188,-188 188,188
MHole#8 [mil] "Mounting Hole for #8 screw"
  round 169 hole 169 unplated: 0(0,0)
  Keep-Out Layer circle w8: c0,0 r150
  silkscreen extent -150,-150 150,150
QFN-28 [mm] "QFN-28"
  rect 1.05x0.25 smd: 1(-2.479,1.5) 2(-2.479,1) 3(-2.479,0.5) 4(-2.479,0) 5(-2.479,-0.5) 6(-2.479,-1) 7(-2.479,-1.5) 15(2.479,-1.5) 16(2.479,-1) 17(2.479,-0.5) 18(2.479,0) 19(2.479,0.5) 20(2.479,1) 21(2.479,1.5)
  rect 0.25x1.05 smd: 8(-1.5,-2.479) 9(-1,-2.479) 10(-0.5,-2.479) 11(0,-2.479) 12(0.5,-2.479) 13(1,-2.479) 14(1.5,-2.479) 22(1.5,2.479) 23(1,2.479) 24(0.5,2.479) 25(0,2.479) 26(-0.5,2.479) 27(-1,2.479) 28(-1.5,2.479)
  rect 3x3 smd: 29(0,0)
  silkscreen extent -3.42,-2.5 2.5,2.5, body extent -2.5,-2.5 2.5,2.5, height 0.8
R0805 [mil]
  rect 50x55 smd: 1(-37,0) 2(37,0)
  silkscreen extent -75,-40 75,40
R1206 [mil]
  rect 55x65 smd: 1(-55,0) 2(55,0)
  silkscreen extent -95,-45 95,45
SO8 [mm] "Small Outline; 8 Leads; Body Width 3.9 mm; Pitch 1.27 mm"
  rect 0.6x2.2 smd: 1(-1.905,-2.6) 2(-0.635,-2.6) 3(0.635,-2.6) 4(1.905,-2.6) 5(1.905,2.6) 6(0.635,2.6) 7(-0.635,2.6) 8(-1.905,2.6)
  silkscreen extent -2.88,-2.72 2.5,1.1
so16w [mm] "Small Outline; 16 Leads; Body Width 7.5 mm; Pitch 1.27 mm"
  rect 0.6x2.25 smd: 1(-4.445,-4.575) 2(-3.175,-4.575) 3(-1.905,-4.575) 4(-0.635,-4.575) 5(0.635,-4.575) 6(1.905,-4.575) 7(3.175,-4.575) 8(4.445,-4.575) 9(4.445,4.575) 10(3.175,4.575) 11(1.905,4.575) 12(0.635,4.575) 13(-0.635,4.575) 14(-1.905,4.575) 15(-3.175,4.575) 16(-4.445,4.575)
  silkscreen extent -5.42,-4.7 5.28,3.05
"SOIC 8" [mm] "Small Outline; 8 Leads; Body Width 3.9 mm; Pitch 1.27 mm"
  rect 0.6x2.05 smd: 1(-1.905,-2.675) 2(-0.635,-2.675) 3(0.635,-2.675) 4(1.905,-2.675) 5(1.905,2.675) 6(0.635,2.675) 7(-0.635,2.675) 8(-1.905,2.675)
  silkscreen extent -2.88,-2.8 2.5,1.25
SOT23 [mm] "SOT-23; 3 Leads; Body 3.1 x 2.5 mm, inc. leads (LxW max), Alternate Lead Configuration"
  rect 0.9x0.95 smd: 1(-0.95,-1.175) 2(0.95,-1.175) 3(0,1.175)
  silkscreen extent -2.05,-1.3 1.3,1.18
SOT23-5 [mm] "SOT-23/SC-74A; 5 Leads; Body 3 x 3 mm, inc. leads (LxW max)"
  rect 0.55x1.45 smd: 1(-0.95,-1.075) 2(0,-1.075) 3(0.95,-1.075) 4(0.95,1.075) 5(-0.95,1.075)
  silkscreen extent -1.57,-1.35 1.55,0.9
TO263\7 [mil]
  rect 36x85 smd: 1(-150,-328) 2(-100,-328) 3(-50,-328) 4(0,-328) 5(50,-328) 6(100,-328) 7(150,-328)
  rect 425x410 smd: 8(0,0)
  silkscreen extent -230,-225 230,225
TQFP-80 [mm] "QFP, Plastic, Thin; 80 Leads; Body 12 x 12 mm; Pitch 0.5 mm; Lead Form 1.0/0.1 mm"
  rect 1.6x0.3 smd: 1(-6.6,4.75) 2(-6.6,4.25) 3(-6.6,3.75) 4(-6.6,3.25) 5(-6.6,2.75) 6(-6.6,2.25) 7(-6.6,1.75) 8(-6.6,1.25) 9(-6.6,0.75) 10(-6.6,0.25) 11(-6.6,-0.25) 12(-6.6,-0.75) 13(-6.6,-1.25) 14(-6.6,-1.75) 15(-6.6,-2.25) 16(-6.6,-2.75) 17(-6.6,-3.25) 18(-6.6,-3.75) 19(-6.6,-4.25) 20(-6.6,-4.75) 41(6.6,-4.75) 42(6.6,-4.25) 43(6.6,-3.75) 44(6.6,-3.25) 45(6.6,-2.75) 46(6.6,-2.25) 47(6.6,-1.75) 48(6.6,-1.25) 49(6.6,-0.75) 50(6.6,-0.25) 51(6.6,0.25) 52(6.6,0.75) 53(6.6,1.25) 54(6.6,1.75) 55(6.6,2.25) 56(6.6,2.75) 57(6.6,3.25) 58(6.6,3.75) 59(6.6,4.25) 60(6.6,4.75)
  rect 0.3x1.6 smd: 21(-4.75,-6.6) 22(-4.25,-6.6) 23(-3.75,-6.6) 24(-3.25,-6.6) 25(-2.75,-6.6) 26(-2.25,-6.6) 27(-1.75,-6.6) 28(-1.25,-6.6) 29(-0.75,-6.6) 30(-0.25,-6.6) 31(0.25,-6.6) 32(0.75,-6.6) 33(1.25,-6.6) 34(1.75,-6.6) 35(2.25,-6.6) 36(2.75,-6.6) 37(3.25,-6.6) 38(3.75,-6.6) 39(4.25,-6.6) 40(4.75,-6.6) 61(4.75,6.6) 62(4.25,6.6) 63(3.75,6.6) 64(3.25,6.6) 65(2.75,6.6) 66(2.25,6.6) 67(1.75,6.6) 68(1.25,6.6) 69(0.75,6.6) 70(0.25,6.6) 71(-0.25,6.6) 72(-0.75,6.6) 73(-1.25,6.6) 74(-1.75,6.6) 75(-2.25,6.6) 76(-2.75,6.6) 77(-3.25,6.6) 78(-3.75,6.6) 79(-4.25,6.6) 80(-4.75,6.6)
  silkscreen extent -6.72,-5.4 5.4,5.57
TSSOP\10 [mm] "T Shrink Small Outline; 10 Leads; Body Width 3 mm; Pitch 0.5 mm"
  rect 0.3x1.6 smd: 1(-1,-2.05) 2(-0.5,-2.05) 3(0,-2.05) 4(0.5,-2.05) 5(1,-2.05) 6(1,2.05) 7(0.5,2.05) 8(0,2.05) 9(-0.5,2.05) 10(-1,2.05)
  silkscreen extent -1.83,-2.17 1.58,0.85
WIRE_125 [mil] "Hole for .125 AMP-IN"
  round 200 hole 125: 1(0,0)
  silkscreen extent -105,-105 105,105
XTSL\CSM-7 [mm] "Quartz Crystal, SM; 2 Leads; Body 11.4 x 4.8 x 5 mm (LxWxH)"
  rect 5.5x2 smd: 1(-4.75,0) 2(4.75,0)
  silkscreen extent -5.7,-2.4 5.7,2.4

## Part data
C1 C3 C4 C6 C8 C10 C11 C13 C17 C23 C32 C33 C34 C37 C42: library part C#S/C0805C104K5RACK, "CAP .10UF 50V CERAMIC X7R 0805"
C2 C9 C19 C21: library part C#S/EEEFK1C100RP, "CAP ELECT 10UF 16V FK SMD"
C5 C7: library part C#S/T491X476K035ATK, "CAPACITOR TANT 47UF 35V 10% SMD 7343-43 (EIA)"
C12 C26: library part C#S/C0805C103K5RAC, "CAP 10000PF 50V CERAMIC X7R 0805"
C14: library part CS/EEVFK1C100RP, "CAP ELECT 10UF 16V FK SMD"
C15 C24 C28: library part C#S/ECJ3YB1E105KP, "CAP 1UF 25V CERAMIC X7R 1206"
C16 C20: library part C#S/C0805C180J5GACTUK, "CAP CERAMIC 18PF 50V NP0 0805"
C18 C22 C30 C31: library part C#S/T495D686K016ATEK, "CAPACITOR TANT 68UF 16V 10% SMD"
C25: library part C#S/ECJ3VB1E334KP, "CAP .33UF 25V CERAMIC X7R 1206"
D1: library part D#S/MURS360T3GM
D2 D7: library part D#S/8TQ080SPBFZ, "DIODE SCHOTTKY 80V 8A D2PAK"
D3 D4 D5: library part D#S/BAS167F0D, "Diodes Inc BAS16 75V 200mA"
DS1 DS2 DS5 DS6 DS9 DS10 DS13 DS14 DS17 DS18 DS21 DS22 DS25 DS26 DS29 DS30 DS33 DS34 DS37 DS38 DS41 DS42 DS45 DS46: library part L#S/TLMK3210, "Vishay Red LED PLCC-3"
DS3 DS4 DS7 DS8 DS11 DS12 DS15 DS16 DS19 DS20 DS23 DS24 DS27 DS28 DS31 DS32 DS35 DS36 DS39 DS40 DS43 DS44 DS47 DS48: library part L#S/LM1PPG103N1Z, "120-degree, 3.3 x 3.5-mm, SMT LED in green color with water-transparent lens"
DS49: library part LRCOVLFR3C7Z, "LED 631NM TAPERED RED 5MM"
DS50: library part LGCOVLFG3C7Z, "LED 525NM ROUND GREEN 5MM"
J1 J2 J3 J4 J5 J6 J7 J8 J9 J10 J11 J12: library part ~125_WIRE
J13: library part 787834-2, "USB Connectors B TYPE VERT BLK SKT"
J14: library part JCPM5086VE0Z, "CONN HEADER VERT 6POS 5.08MM"
JP1 JP2 JP3 JP4: library part RS/ERJ6ENF, "RES 0.0 OHM 1/8W 5% 0805 SMD"
L1 L2: library part N#S/DO5022P333Z, "33uH 3A Surface Mount Inductor"
M1 M2 M3 M4: library part MountingHole_1/4
M5 M6 M7 M8 M9 M10: library part MountingHole_8
Q1 Q2: library part Q#S/FDS8884F, "MOSFET N-CH 30V 8.5A 8-SOIC"
R1 R2 R3 R6 R10 R14 R19 R21 R23 R26 R27 R30: library part RS/ERJ6ENF, "RES 100K OHM 1/8W 1% 0805 SMD"
R4 R11 R20 R28 R40 R112 R130: library part RS/ERJ6ENF, "RES 10.0K OHM 1/8W 1% 0805 SMD"
R5: library part RS/ERJ8ENF, "RES 121 OHM 1/4W 1% 1206 SMD"
R7 R17: library part RS/ERJ6ENF, "RES 1.00K OHM 1/8W 1% 0805 SMD"
R8 R22 R29: library part RS/ERJ6GEYJ, "RES 0.0 OHM 1/8W 5% 0805 SMD"
R9 R128: library part RS/ERJ6ENF, "RES 3.16K OHM 1/8W 1% 0805 SMD"
R12: library part RS/ERJ6ENF, "RES 499 OHM 1/8W 1% 0805 SMD"
R13: library part RS/ERJ6ENF, "RES 3.32K OHM 1/8W 1% 0805 SMD"
R15: library part RS/ERJ6ENF, "RES 47.5K OHM 1/8W 1% 0805 SMD"
R16 R129: library part RS/ERJ6ENF, "RES 20.0K OHM 1/8W 1% 0805 SMD"
R18: library part RS/ERJ6ENF, "RES 1.65K OHM 1/8W 1% 0805 SMD"
R24: library part RS/ERJ6ENF, "RES 7.50K OHM 1/8W 1% 0805 SMD"
R25: library part RS/ERJ6ENF, "RES 2.49K OHM 1/8W 1% 0805 SMD"
R46 R47 R48 R49 R50 R51 R52 R53 R54 R55 R56 R57 R88 R89 R90 R91 R92 R93 R94 R95 R96 R97 R98 R99: library part RS/ERJ8ENF, "RES 15.0 OHM 1/4W 1% 1206 SMD"
R58 R59 R60 R61 R62 R63 R64 R65 R66 R67 R68 R69 R100 R101 R102 R103 R104 R105 R106 R107 R108 R109 R110 R111: library part RS/ERJ8ENF, "RES 32.4 OHM 1/4W 1% 1206 SMD"
U1 U4 U8 U9: library part IS/M25P64VMF6GZ, "64 MBit Serial SPI NOR FLASH"
U2: library part IS/DSPIC30F501320IPTZ_1, "IC DSPIC MCU/DSP 144K 80TQFP"
U3: library part IS/SN65HVD230DRT, "IC 3.3V CAN TXRX W/STNDBY 8-SOIC"
U5: library part IS/CS4344CZZZ, "IC DAC 24BIT 192KHZ 10-TSSOP"
U6 U11: library part IS/LM2676SADJN, "IC REG SIMPLE SWITCHER TO-263-7"
U7: library part IS/LP2950CDT33N, "IC REG VOLT MICROPWR 3.3V TO-252"
U10: "IC AMP AUDIO PWR W/SHUTDN 8-SOIC"
U12: library part I#S/MOCD207MZ, "OPTOCOUPLER TRANS-OUT 2CH 8-SOIC"
U13: library part I#S/SN74AHC1G125DBVT, "TI Tri State Buffer Single Gate"
U14: library part CP2102
Y1: library part ZS/ECS1228205PTRZ, "CRYSTAL 8.192MHZ 18PF FUND SMD"

## Free pads (board coordinates)
  round 250 hole 250 unplated: 0(-2500,-790) 0(-2500,-490) 0(-2200,-1090) 0(-2200,-790) 0(1800,-2600) 1(830,2510) 1(1540,-2600) 1(2040,-1650) 2(800,-2600) 3(0,-2600)
  round 125 hole 125 unplated paste+0 mask+25: 0(-2480,390)
  round 125 hole 125 unplated: 1(-2120,2600) 1(-1330,-700) 1(-990,-250) 1(-950,2280) 1(-870,1080) 1(-840,570) 1(-780,710) 1(-750,1220) 1(-490,-1400) 1(-380,2180) 1(-320,-1440) 1(-160,-1440) 1(-160,1420) 1(0,-1440) 1(0,1420) 1(160,-1440) 1(160,1420) 1(330,-1440) 1(500,-1330) 1(500,1330) 1(680,-1250) 1(840,-1090) 1(1070,1140) 1(1420,0) 1(1480,-360) 1(2000,-1900) 1(2330,220)
  round 200 hole 169: 1(-1560,2620)
  round 169 hole 169 unplated: 1(-1040,-970) 1(-830,-1150) 1(-670,-1300) 1(700,2310) 1(1500,1580) 1(1950,1260) 1(1950,1500) 1(2400,1610)
  round 150 hole 125 paste+0 mask+25: 2(-2660,1340)

## Via types
v1: diameter 24, hole 12, Top Layer to Bottom Layer, 316 vias
v2: diameter 25, hole 15, Top Layer to Bottom Layer, 67 vias
v3: diameter 40, hole 24, Top Layer to Bottom Layer, 5 vias

## Nets (pads, with @x,y where several pads share a name; then routed paths per layer and width w, separated by ;. In a path a pad name is that pad's centre, name@x,y a point inside that pad or via, vN(x,y) a via of type N, cw(c..) or ccw(c..) an arc to the next point about the centre after c; other vN are vias at no path point)
GND: C1.2 C2.2 C3.2 C4.2 C5.2 C6.2 C7.2 C8.2 C9.2 C10.2 C11.2 C13.2 C14.2 C16.2 C17.2 C18.2 C19.2 C20.2 C21.2 C22.2 C23.2 C24.2 C28.2 C30.2 C31.2 C32.2 C33.2 C34.2 C37.2 C42.2 D2.3 D3.1 D4.1 D5.1 D7.3 DS49.2 DS50.2 J1.1 J5.1 J12.1 J13.4 J14.3 JP1.2 JP2.2 JP3.2 JP4.2 pad.2@-2660,1340 Q1.1 Q1.2 Q1.3 Q2.1 Q2.2 Q2.3 R7.1 R11.1 R17.1 R25.1 U1.10 U2.11 U2.26 U2.31 U2.51 U2.70 U2.79 U3.2 U4.10 U5.8 U6.4 U6.8 U7.2 U8.10 U9.10 U10.7 U11.4 U11.8 U12.7 U13.3 U14.3 U14.29 | length 12897.4
  Top Layer w10: -126,2516 C6.2@-126,2549 ; C9.2@29,2516 74,2516 124,2566 194,2566 210,2550 U5.8@210,2505.29 ; U3.2@1420.31,2300 1480,2300 1492,2288 C8.2@1540,2288 ; C8.2@1540,2293 v1(1540,2240) 1557,2223 C16.2@1650,2223 ; v1(1740,1740) 1747.32,1732.68 U2.79@1790.16,1732.68 ; C32.2@1765,-1431 U10.7@1765,-1325.36 ; C32.2@1777,-1443 v1(1830,-1443) ; U2.70@1790.16,1909.84 1840.16,1909.84 v1(1850,1900) ; U2.51@2040.16,2159.84 2040.16,2099.84 v1(2050,2090) ; U2.11@2059.84,1640.16 2059.84,1719.84 v1(2090,1750) ; D3.1@2076.26,-2607.4 2107.4,-2607.4 v1(2120,-2620) ; D4.1@2076.26,-2417.4 2107.4,-2417.4 v1(2120,-2430) ; D5.1@2076.26,-2227.4 2107.4,-2227.4 v1(2120,-2240) ; v1(2150,-2600) C42.2@2200,-2600 ; U8.10@2249.88,-1755 2425,-1755 2463,-1793 C23.2@2463,-2160 2250,-2160 2230,-2180 2230,-2310 2250.32,-2330.31 U14.3@2299.45,-2330.31 ; U9.10@2249.88,-1065 2365,-1065 2375,-1075 2375,-1405 2373,-1407 v1(2373,-1517) ; U4.10@2249.88,-325 2395,-325 2410,-340 v1(2410,-720) 2453,-720 C11.2@2463,-730 ; U1.10@2249.88,745 2460,745 2473,732 C4.2@2473,345 ; v1(2260.16,1909.84) U2.31@2309.84,1909.84 ; U2.26@2309.84,1811.42 2505.58,1811.42 C3.2@2567,1750 v1(2567,1702) ; v2(2420,340) C4.2@2473,340 ; C20.2@2627,2310 v1(2680,2310)
  Top Layer w20: U7.2@-670,2471 R25.1@-670,2197 C37.2@-560,2197 ; U12.7@525.31,1835 465,1835 450,1850 450,1930 520,2000 v1(630,2000) ; U13.3@587.4,2447.68 587.4,2382.6 v1(590,2380) ; JP3.2@1307,1450 1307,1350 v1(1580,1350) ; JP2.2@1307,1550 JP1.2@1307,1650 v1(1360,1650) ; C2.2@1440,2020 v1(1500,2020) v1(1533,1987) C1.2@1590,1987 ; C28.2@1690,-858 1690,-750 1767.5,-672.5 v1(1977.5,-672.5) ; v3(2390,-2352) U14.29@2390,-2350
  Top Layer w30: C9.2@29,2516 -231,2516 -246,2501 -246,2236 -231,2221 185,2221 ; C17.2@190,2274 190,2080 206,2064 C24.2@491,2064
  Top Layer w35: R17.1@-2387,320 -2387,373 -2380,380 U11.8@-1940,380 ; v2(-1340,930) D7.3@-1340,1050 ; v2(-1310,930) D7.3@-1310,1050
  Top Layer w40: C5.2@-2610,910 -2610,1200 -2380,1430 C22.2@-2380,1745 -2525,1890 v1(-2525,2100) v1(-2465,2160) v1(-2315,2160) v1(-2255,2100) ; v1(-2427.31,1382.69) -2369.61,1325 C10.2@-2052,1325 ; v1@-2377,1657 R7.1@-2165,1657 ; R7.1@-2162,1660 U6.4@-2018,1660 ; v1(-930,2630) C13.2@-862,2630 ; C13.2@-860,2632 -668,2632 -655,2645 v1(-365,2645)
  Top Layer w100: -690,1540 C30.2@-690,1625 C31.2@-490,1625 v1(-490,1540) -690,1540
  Top Layer w150: J5.1@-147.97,839.17 cw(c0,0) J1.1@147.97,839.17
  Bottom Layer w20: v3@2389,-2353 v3(2390,-2352)
  Bottom Layer w150: J5.1@-147.97,839.17 cw(c0,0) J1.1@147.97,839.17
  other v1: 2410,-2160 -1310,990 -2670,1030 -2540,1270 -2310,1325 -2240,1325 -2165,1325 -2484.35,1325.65 -690,1510 -2380,1655 -246,2437
  other v2: -1670,120 -1630,120 -1590,120 -1550,140 2040,180 2040,210 2040,240 -1550,250 2040,270 -1550,290 2040,300 -1550,430 2040,520 2040,550 -1550,580 2040,580 2040,610 2040,640 2040,670 -1340,960 -1310,960 -1340,990 -660,1510 -630,1510 -530,1540 -1450,1580 -1450,1610 -1450,1640 -1450,1670 -1450,1700 -1450,1730 -1450,1760 -1450,1790 -1450,1820 -1450,1850 190,2090
  other v3: 2354,-2385 2424,-2385 2355,-2316 2425,-2316
NetC5_1: C5.1 C7.1 C10.1 C13.1 C34.1 D1.K R24.2 U6.2 U7.1 U11.2 U12.1 U12.4 | length 5135.7
  Top Layer w20: -860,1980 170,1980 265,1885 U12.1@314.69,1885 365,1885 390,1860 390,1760 365,1735 U12.4@314.69,1735 ; R24.2@-857,2120 -857,2201
  Top Layer w35: -2300,600 -2300,532.6 -2247.4,480 U11.2@-2138,480
  Top Layer w40: C5.1@-2359.02,910 -2359.02,1145 -2105,1145 -1978,1272 -1978,1382 -1940,1420 -1940,1920 -1400,1920 -1280,1800 -1000,1800 -860,1940 C13.1@-860,2558 ; U6.2@-2018,1760 -1940,1760 ; -860,2305 -855.16,2300.16 U7.1@-759.96,2300.16
NetC6_1: C6.1 C9.1 U5.5 | length 308.7
  Top Layer w10: C6.1@-126,2623 -93,2656 C9.1@29,2656 U5.5@169,2656
NetC12_1: C12.1 U6.3 | length 164.8
  Top Layer w10: C12.1@-2165,1753 -2122,1710 U6.3@-2018,1710
NetC12_2: C12.2 D2.2 L1.1 pad.1@-1560,2620 U6.1 | length 1060.4
  Top Layer w40: L1.1@-2395,1997.5 -1747.5,1997.5 -1740,2005 D2.2@-1823,2005 ; C12.2@-2165,1827 U6.1@-2021,1827 ; U6.1@-2020,1820 -2018,1822 -2018,1994.5
NetC14_1: C14.1 U5.6 | length 470.8
  Top Layer w10: C14.1@-175,2361 -175,2425 -159,2441 154,2441 170.63,2457.63 U5.6@170.63,2505.29
NetC15_1: C15.1 U5.10 | length 176.1
  Top Layer w10: U5.10@249.37,2505.29 249.37,2445.63 290,2405 C15.1@290,2346
NetC15_2: C15.2 R11.2 R12.1 | length 346.3
  Top Layer w10: R11.2@290,2138 C15.2@290,2236 354,2236 461,2343 R12.1@494,2343
NetC16_1: C16.1 R8.2 Y1.2 | length 410.8
  Top Layer w10: C16.1@1650,2297 R8.2@1750,2297 1967,2297 1992.99,2322.99 Y1.2@1992.99,2380
NetC18_1: C18.1 C22.1 C32.1 DS3.2 DS4.2 DS7.2 DS8.2 DS11.2 DS12.2 DS15.2 DS16.2 DS19.2 DS20.2 DS23.2 DS24.2 DS27.2 DS28.2 DS31.2 DS32.2 DS35.2 DS36.2 DS39.2 DS40.2 DS43.2 DS44.2 DS47.2 DS48.2 L1.2 R9.2 U10.6 | length 8117.4
  Top Layer w10: C32.1@1703,-1443 1703,-1397 1715,-1385 U10.6@1715,-1325.36
  Top Layer w20: v1(1170,-1130) 1170,-1150 1470,-1450 v1(1470,-1500) ; v1(1620,-1440) C32.1@1700,-1440
  Top Layer w40: C18.1@-2630,1530 -2630,2525 -2552.5,2602.5 L1.2@-2395,2602.5 ; v1(-2218,1413) R9.2@-2165,1413
  Bottom Layer w10: v1(-2700,800) -2570,930 -2570,1410 -2630,1470 v1(-2630,1645) ; -549.77,1659.77 DS15.2@-549.77,1752.02
  Bottom Layer w20: DS28.2@-1871.85,-29.53 -1700.47,-29.53 v1(-1700,-30) ; DS23.2@-1817.3,442.72 -1755.62,442.72 -1692.9,380 v2(-1310,380) ; DS27.2@-1802.02,-499.77 -1689.77,-499.77 v1(-1650,-460) ; DS24.2@-1642.73,885.85 -1625.85,885.85 -1480,740 v1(-1400,740) ; DS32.2@-1613.21,-936 -1556,-936 v1(-1480,-860) ; DS19.2@-1363.3,1271.54 -1363.3,1233.3 v1(-1270,1140) ; DS31.2@-1317.54,-1309.3 -1309.3,-1309.3 v1(-1200,-1200) ; DS20.2@-986,1563.21 -986,1486 v1(-920,1420) ; DS36.2@-934.85,-1592.73 -934.85,-1564.85 v1(-840,-1470) ; -549.77,1659.77 v1(-410,1520) ; DS35.2@-492.72,-1767.3 -430,-1704.58 v1(-430,-1620) ; v1(-80,1640) -79.53,1640.47 DS16.2@-79.53,1821.85 ; DS40.2@-20.47,-1821.85 -20.47,-1660.47 v1(-20,-1660) ; v1(330,1610) 330,1704.58 DS11.2@392.72,1767.3 ; v1(420,-1600) 449.77,-1629.77 DS39.2@449.77,-1752.02 ; v1(730,1470) 835.85,1575.85 DS12.2@835.85,1592.73 ; v1(830,-1410) 887,-1467 DS44.2@887,-1563.21 ; v1(1030,1240) 1100,1240 1169.3,1309.3 DS7.2@1217.54,1309.3 ; v1(1170,-1130) 1259.3,-1219.3 DS43.2@1259.3,-1267.54 ; v1(1340,320) 1519.77,499.77 DS3.2@1702.02,499.77 ; v1(1360,880) 1417,937 DS8.2@1513.21,937 ; v1(1415.95,-790) 1510.81,-884.85 DS48.2@1542.73,-884.85 ; v1(1470,-1500) 1530,-1440 v1(1620,-1440) ; v1(1570,-390) 1617.28,-390 1670,-442.72 DS47.2@1717.3,-442.72 ; v1(1610,30) 1610.47,29.53 DS4.2@1771.85,29.53
  other v1: -2630,1900 -2630,2000 -2630,2100 -2630,2200 -2630,2300 -2630,2400
NetC20_1: C20.1 U2.49 Y1.1 | length 644.4
  Top Layer w10: U2.49@2079.53,2159.84 2079.53,2209.53 2250,2380 2520,2380 2553,2347 C20.1@2553,2310
NetC24_1: C24.1 C25.1 R12.2 | length 5000.6
  Top Layer w10: C24.1@494,2171 R12.2@494,2269 ; v1(990,2210) 920,2210 900,2190 900,1800 940,1760 1470,1760 1770,1460 1770,1160 2122.5,807.5 2122.5,192.5 2070,140 2070,-590 2020,-640 1668,-640 C25.1@1500,-808
  Bottom Layer w10: v1(494,2221) 599,2221 640,2180 900,2180 930,2210 v1(990,2210)
NetC25_2: C25.2 R13.1 | length 98
  Top Layer w10: R13.1@1500,-1016 C25.2@1500,-918
NetC26_1: C26.1 U11.3 | length 341.4
  Top Layer w15: v1(-2420,450) -2417.4,452.6 C26.1@-2370,452.6 ; v1(-2200,430) U11.3@-2138,430
  Bottom Layer w15: v1(-2420,450) -2220,450 v1(-2200,430)
NetC26_2: C26.2 D7.2 L2.1 U11.1 | length 1920.4
  Top Layer w15: v1(-2420,530) -2372.6,530 C26.2@-2370,527.4 ; v1(-2230,550) -2210,530 U11.1@-2138,530
  Top Layer w35: U11.1@-2138,530 -2138,622 -2020,740 -2020,880 -1990,910 -1790,910 -1780,900 D7.2@-1776.54,900 ; D7.2@-1776.54,1073.46 -1660,1190
  Top Layer w150: -1560,1300 -1280,1300 -1100,1480 L2.1@-1100,1692.5
  Bottom Layer w15: v1(-2420,530) -2400,550 v1(-2230,550)
NetC28_1: C28.1 U10.2 U10.3 | length 213
  Top Layer w10: C28.1@1690,-968 1690,-1023 1715,-1048 U10.3@1715,-1120.64 U10.2@1765,-1120.64
NetC30_1: C30.1 C31.1 DS1.2 DS2.2 DS5.2 DS6.2 DS9.2 DS10.2 DS13.2 DS14.2 DS17.2 DS18.2 DS21.2 DS22.2 DS25.2 DS26.2 DS29.2 DS30.2 DS33.2 DS34.2 DS37.2 DS38.2 DS41.2 DS42.2 DS45.2 DS46.2 L2.2 R18.2 | length 19136.8
  Top Layer w20: R18.2@-2387,230 -2387,197 -2375,185 -2105,185 -2060,140 -2060,-60 -2030,-90 v1(-1500,-90)
  Top Layer w75: v1(-1520,-400) -1520,-680 -760,-1440 -650,-1550 -340,-1550 -320,-1570 350,-1570 380,-1540 550,-1540 650,-1440 v1(1100,-990) ; v1(-1500,-90) -1380,-90 -1370,-80 -1370,510 -1240,640 -1240,735 -1185,790 -1185,905 -1100,990 L2.2@-1100,1137.5 ; v1(1230,-800) 1440,-590 ; v1(1440,-570) 1360,-490 1360,-310 1440,-230 v1(1440,-160) 1540,-60 1540,40 v1(1470,110)
  Top Layer w100: L2.2@-1100,1137.5 -1082.5,1137.5 -845,1375 -385,1375 -220,1540 210,1540 300,1450 580,1450 v2(815,1220) v1(840,1220) ; v1(990,1000) 1160,1000 1260,900 1260,630 1310,580 v1(1310,570)
  Bottom Layer w20: DS22.2@-1860.16,208.79 -1737.85,208.79 -1689.06,160 -1580,160 -1490,250 v1(-1370,250) ; DS25.2@-1852.45,-267.34 -1677.34,-267.34 v1(-1500,-90) ; DS21.2@-1744.2,670.38 -1702.48,670.38 -1582.1,550 -1520,550 -1450,480 v1(-1370,480) ; DS26.2@-1721.6,-724.94 -1584.94,-724.94 v1(-1520,-660) ; DS18.2@-1513.81,1085.22 -1513.81,1023.81 -1350,860 v1(-1185,860) ; DS29.2@-1477.86,-1132.07 -1462.07,-1132.07 v1(-1260,-930) ; DS30.2@-1135.22,-1463.81 -1135.22,-1445.22 v1(-940,-1250) ; v1(-1010,1210) -1182.07,1382.07 ; DS14.2@-774.94,1671.6 -774.94,1494.94 -660,1380 v1(-590,1380) ; DS33.2@-720.38,-1694.2 -640,-1613.82 v1(-640,-1540) ; DS13.2@-317.34,1802.45 -298.79,1783.91 -298.79,1608.79 v1(-220,1530) ; -258.79,-1698.79 DS34.2@-258.79,-1810.16 -258.79,-1718.79 -190,-1650 v1(-190,-1570) ; v1(140,1540) 140,1791.37 DS10.2@158.79,1810.16 ; DS37.2@217.34,-1802.45 v1@217.34,-1572.66 ; v1(500,1450) 500,1540 620.38,1660.38 DS9.2@620.38,1694.2 ; v1(617.81,-1479.01) 674.94,-1536.14 DS38.2@674.94,-1671.6 674.94,-1544.94 ; v1(750,1290) 810,1350 900,1350 1013.81,1463.81 DS6.2@1035.22,1463.81 ; v1(900,-1190) 1082.07,-1372.07 DS41.2@1082.07,-1427.86 ; v1(1180,990) 1322.07,1132.07 DS5.2@1377.86,1132.07 ; 1192.45,-977.55 1279.91,-977.55 1387.58,-1085.22 DS42.2@1413.81,-1085.22 ; v1(1310,570) 1310,610 1424.94,724.94 DS2.2@1621.6,724.94 ; v1(1440,-570) 1502.1,-570 1602.48,-670.38 DS45.2@1644.2,-670.38 ; v1(1440,-160) 1610,-160 1658.79,-208.79 DS46.2@1760.16,-208.79 ; v1(1470,110) 1470,180 1557.34,267.34 DS1.2@1752.45,267.34 ; -1182.07,1382.07 DS17.2@-1182.07,1427.86 -1182.07,1382.07
  Bottom Layer w75: v2@-1520,-430 v1(-1520,-400) -1440,-330 v1(-1440,-90) ; v1(1100,-990) 1180,-990 1230,-940 v1(1230,-800)
  Bottom Layer w100: v1(840,1220) 840,1170 990,1020 v1(990,1000)
  other v1: 220,-1570
  other v2: 1100,-1015 1075,-990 1125,-990 1100,-965 1230,-825 1205,-800 1255,-800 1230,-775 -1520,-440 -1540,-420 -1500,-420 -1440,-115 -1465,-90 -1415,-90 -1440,-65 990,970 960,1000 1020,1000 990,1030 840,1195 865,1220 840,1245
NetC37_1: C37.1 R24.1 R25.2 U2.18 | length 3515.1
  Top Layer w10: v1(1530,1750) 1670,1610 v1(1740,1610) ; U2.18@2197.64,1640.16 2197.64,1562.36 v1(2210,1550)
  Top Layer w20: R24.1@-785,2123 v1(-503,2123)
  Bottom Layer w10: v1(-503,2123) -480,2100 -310,2100 -259.25,2150.75 639.25,2150.75 670,2120 890,2120 900,2110 900,1890 960,1830 980,1830 1020,1790 1040,1790 1060,1770 1510,1770 v1(1530,1750) ; v1(1740,1610) 1760,1630 2130,1630 v1(2210,1550)
NetD1_A: D1.A J2.1 J6.1 | length 3942.1
  Top Layer w150: D1.A@-2630.12,710 -2630.12,-129.88 -2480,-280 -1460,-280 -1410,-230 -1340,-230 -1300,-190 -1240,-190 -1190,-140 -1130,-140 -1090,-100 -1050,-100 -930,20 -930,159.16 J2.1@-798.52,290.64 ; J2.1@-798.52,290.64 cw(c0.61,-0.22) -650.85,546.41 ccw(c0.61,-0.22) J2.1@-798.52,290.64
  Bottom Layer w150: J2.1@-799.13,290.86 cw(c0,0) J6.1@-651.45,546.63
NetD3_3: D3.3 J13.1 U14.8 | length 2352.9
  Top Layer w10: J13.1@472.83,-2330.79 410,-2393.62 410,-2460 440,-2490 640,-2490 820,-2310 1723.74,-2310 D3.3@1983.74,-2570 2110,-2570 2130,-2550 2130,-2530 2180,-2480 2320,-2480 2330.94,-2469.06 U14.8@2330.94,-2440.55
NetD4_3: D4.3 J13.2 U14.5 | length 1934.1
  Top Layer w10: J13.2@472.83,-2429.21 650.79,-2429.21 800,-2280 1820,-2280 1920,-2380 2170,-2380 2180.31,-2369.69 U14.5@2299.45,-2369.69
NetD5_3: D5.3 J13.3 U14.4 | length 2363.6
  Top Layer w10: J13.3@346.85,-2429.21 309.21,-2429.21 279.21,-2399.21 279.21,-2280.79 310,-2250 1750,-2250 1810,-2190 2120,-2190 2170,-2240 2170,-2310 2210,-2350 U14.4@2299.45,-2350
NetDS1_1: DS1.1 DS1.3 DS1.4 R46.2 | length 509.6
  Top Layer w20: R46.2@1304.68,81.91 1358.09,81.91 v1(1360,80)
  Bottom Layer w20: v1(1360,80) 1570,80 1660,170 1721.37,170 DS1.3@1760.16,208.79
NetDS2_1: DS2.1 DS2.3 DS2.4 R47.2 | length 515.3
  Top Layer w20: R47.2@1242.13,402.98 1287.02,402.98 v1(1290,400)
  Bottom Layer w20: v1(1290,400) 1373.82,400 DS2.3@1644.2,670.38
NetDS3_1: DS3.1 DS3.3 DS3.4 R58.2 | length 523.3
  Top Layer w20: R58.2@1280,245 1325,245 v1(1330,240)
  Bottom Layer w20: v1(1330,240) 1470,380 1654.58,380 DS3.3@1717.3,442.72
NetDS4_1: DS4.1 DS4.3 DS4.4 R59.2 | length 487.8
  Top Layer w20: R59.2@1305,-80 v1(1350,-80)
  Bottom Layer w20: v1(1350,-80) 1721.38,-80 DS4.3@1771.85,-29.53
NetDS5_1: DS5.1 DS5.3 DS5.4 R48.2 | length 527.3
  Top Layer w20: R48.2@1095.71,695.38 1105.38,695.38 v1(1150,740)
  Bottom Layer w20: v1(1150,740) 1150,821.41 DS5.3@1413.81,1085.22
NetDS6_1: DS6.1 DS6.3 DS6.4 R49.2 | length 600
  Top Layer w20: R49.2@760,1095 v1(760,1160)
  Bottom Layer w20: v1(760,1160) 760,1240 830,1310 990,1310 DS6.3@1082.07,1402.07 ; 1082.07,1362.07 DS6.3@1082.07,1427.86
NetDS7_1: DS7.1 DS7.3 DS7.4 R60.2 | length 491.4
  Top Layer w20: R60.2@1105,840 1105,905 v1(1110,910)
  Bottom Layer w20: v1(1110,910) 1110,980 1180,1050 1180,1188.24 DS7.3@1259.3,1267.54